# Allegro board core.brd
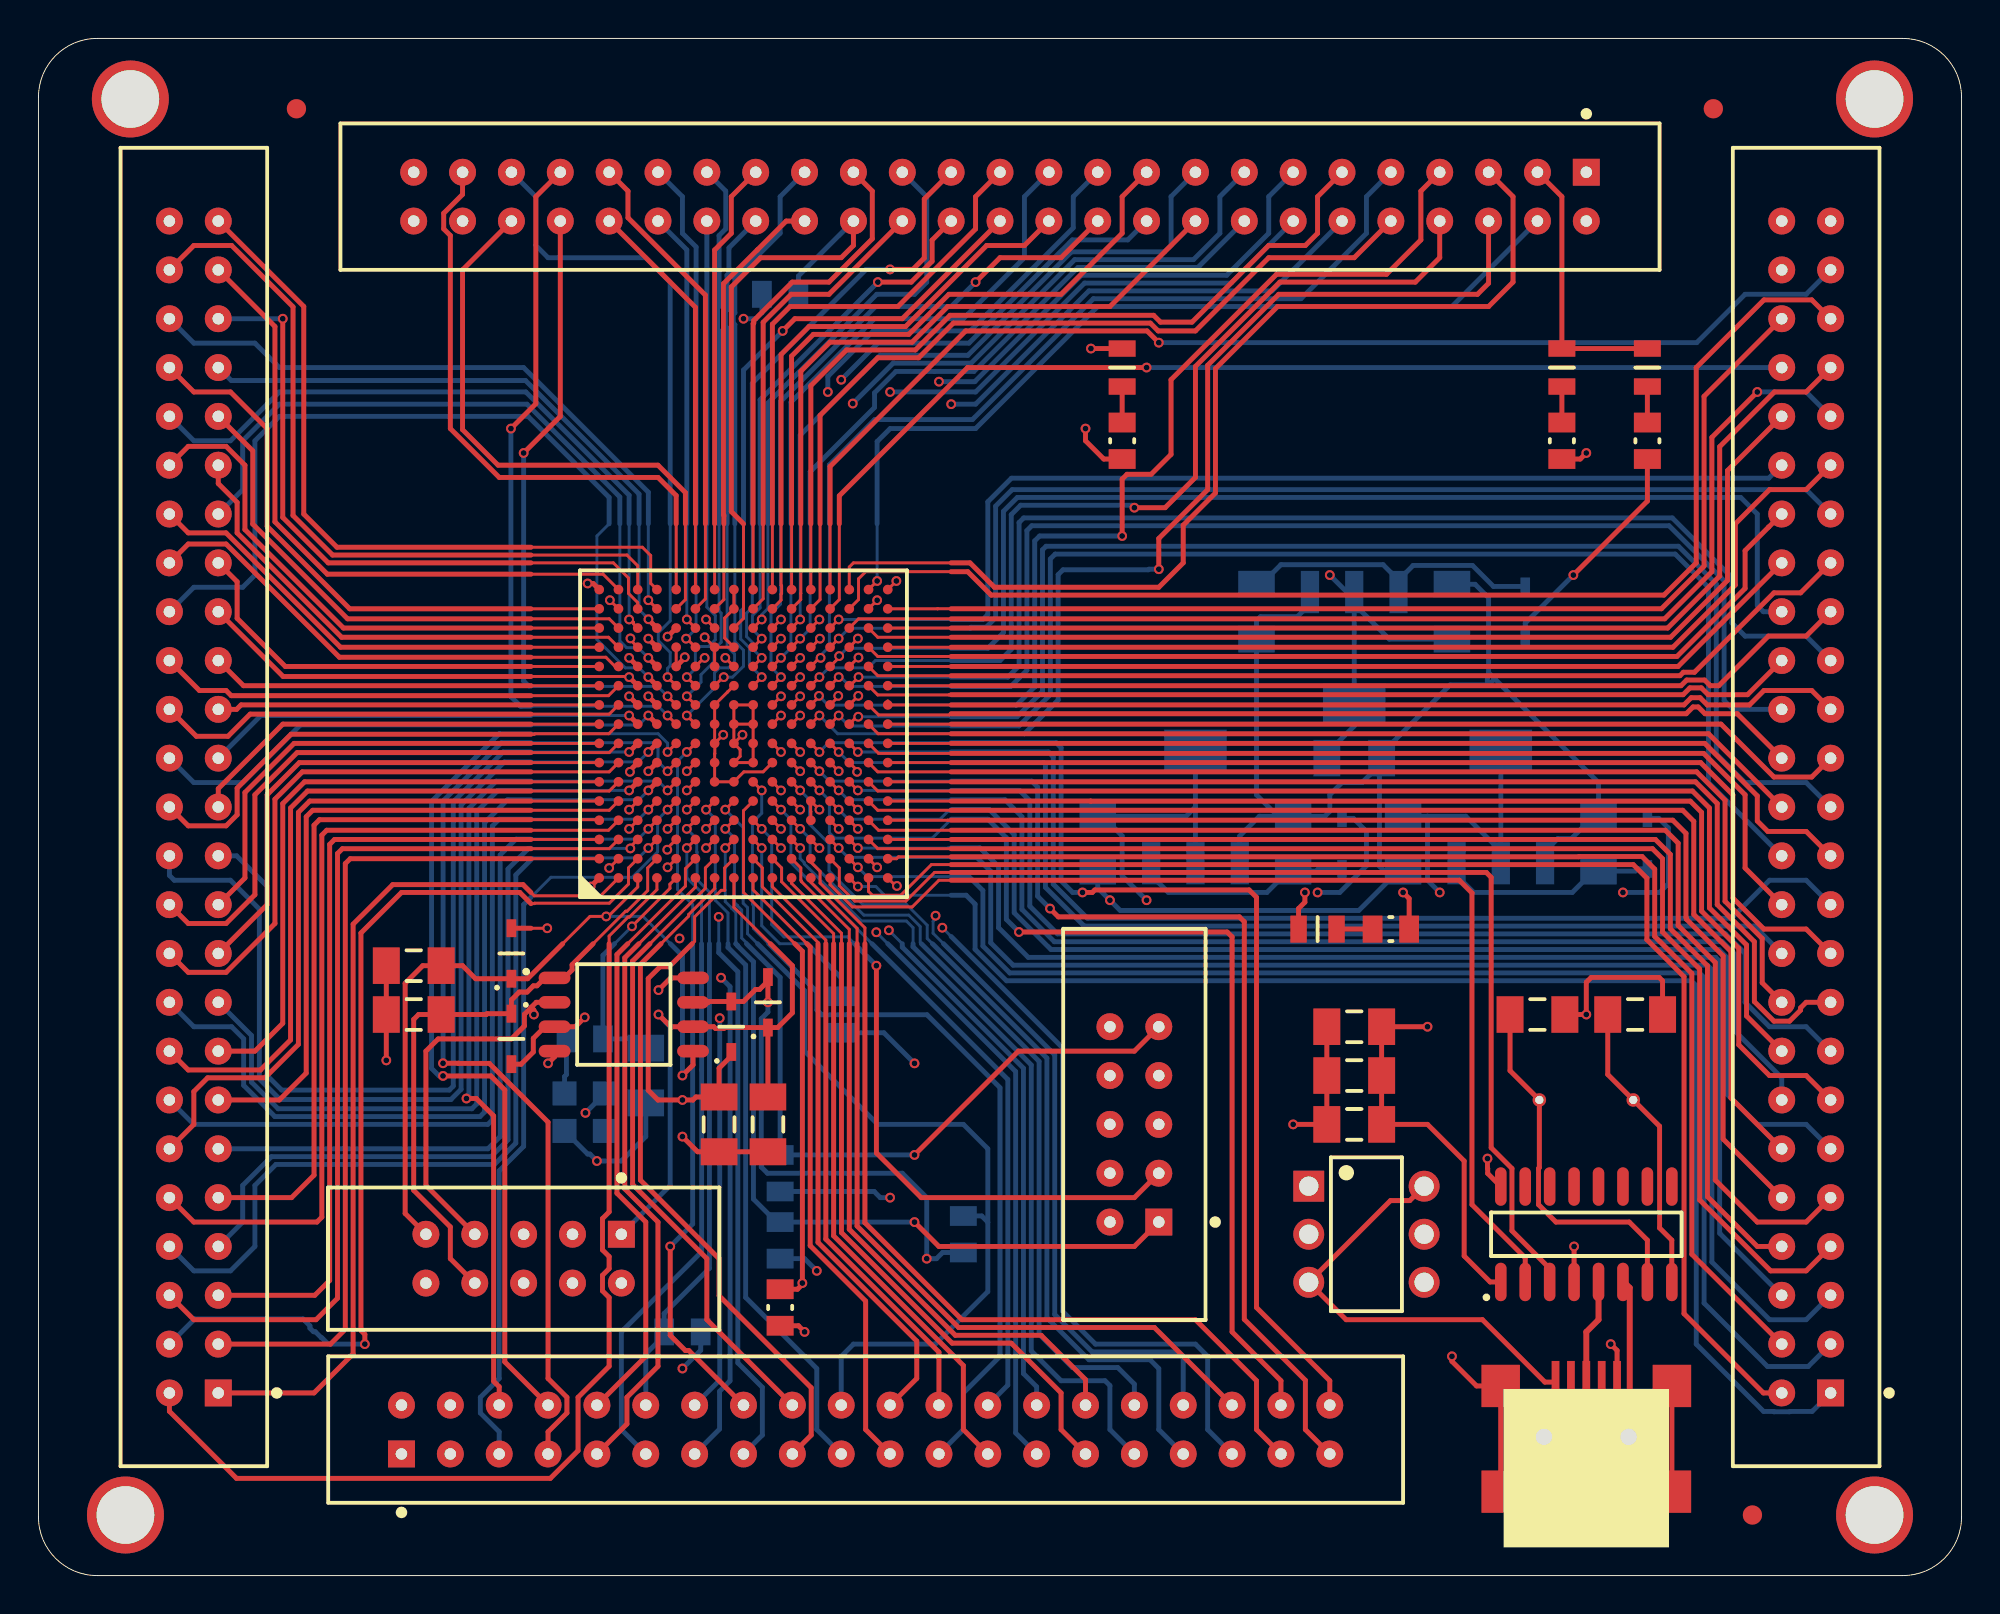
[diagram p0: board, top side]
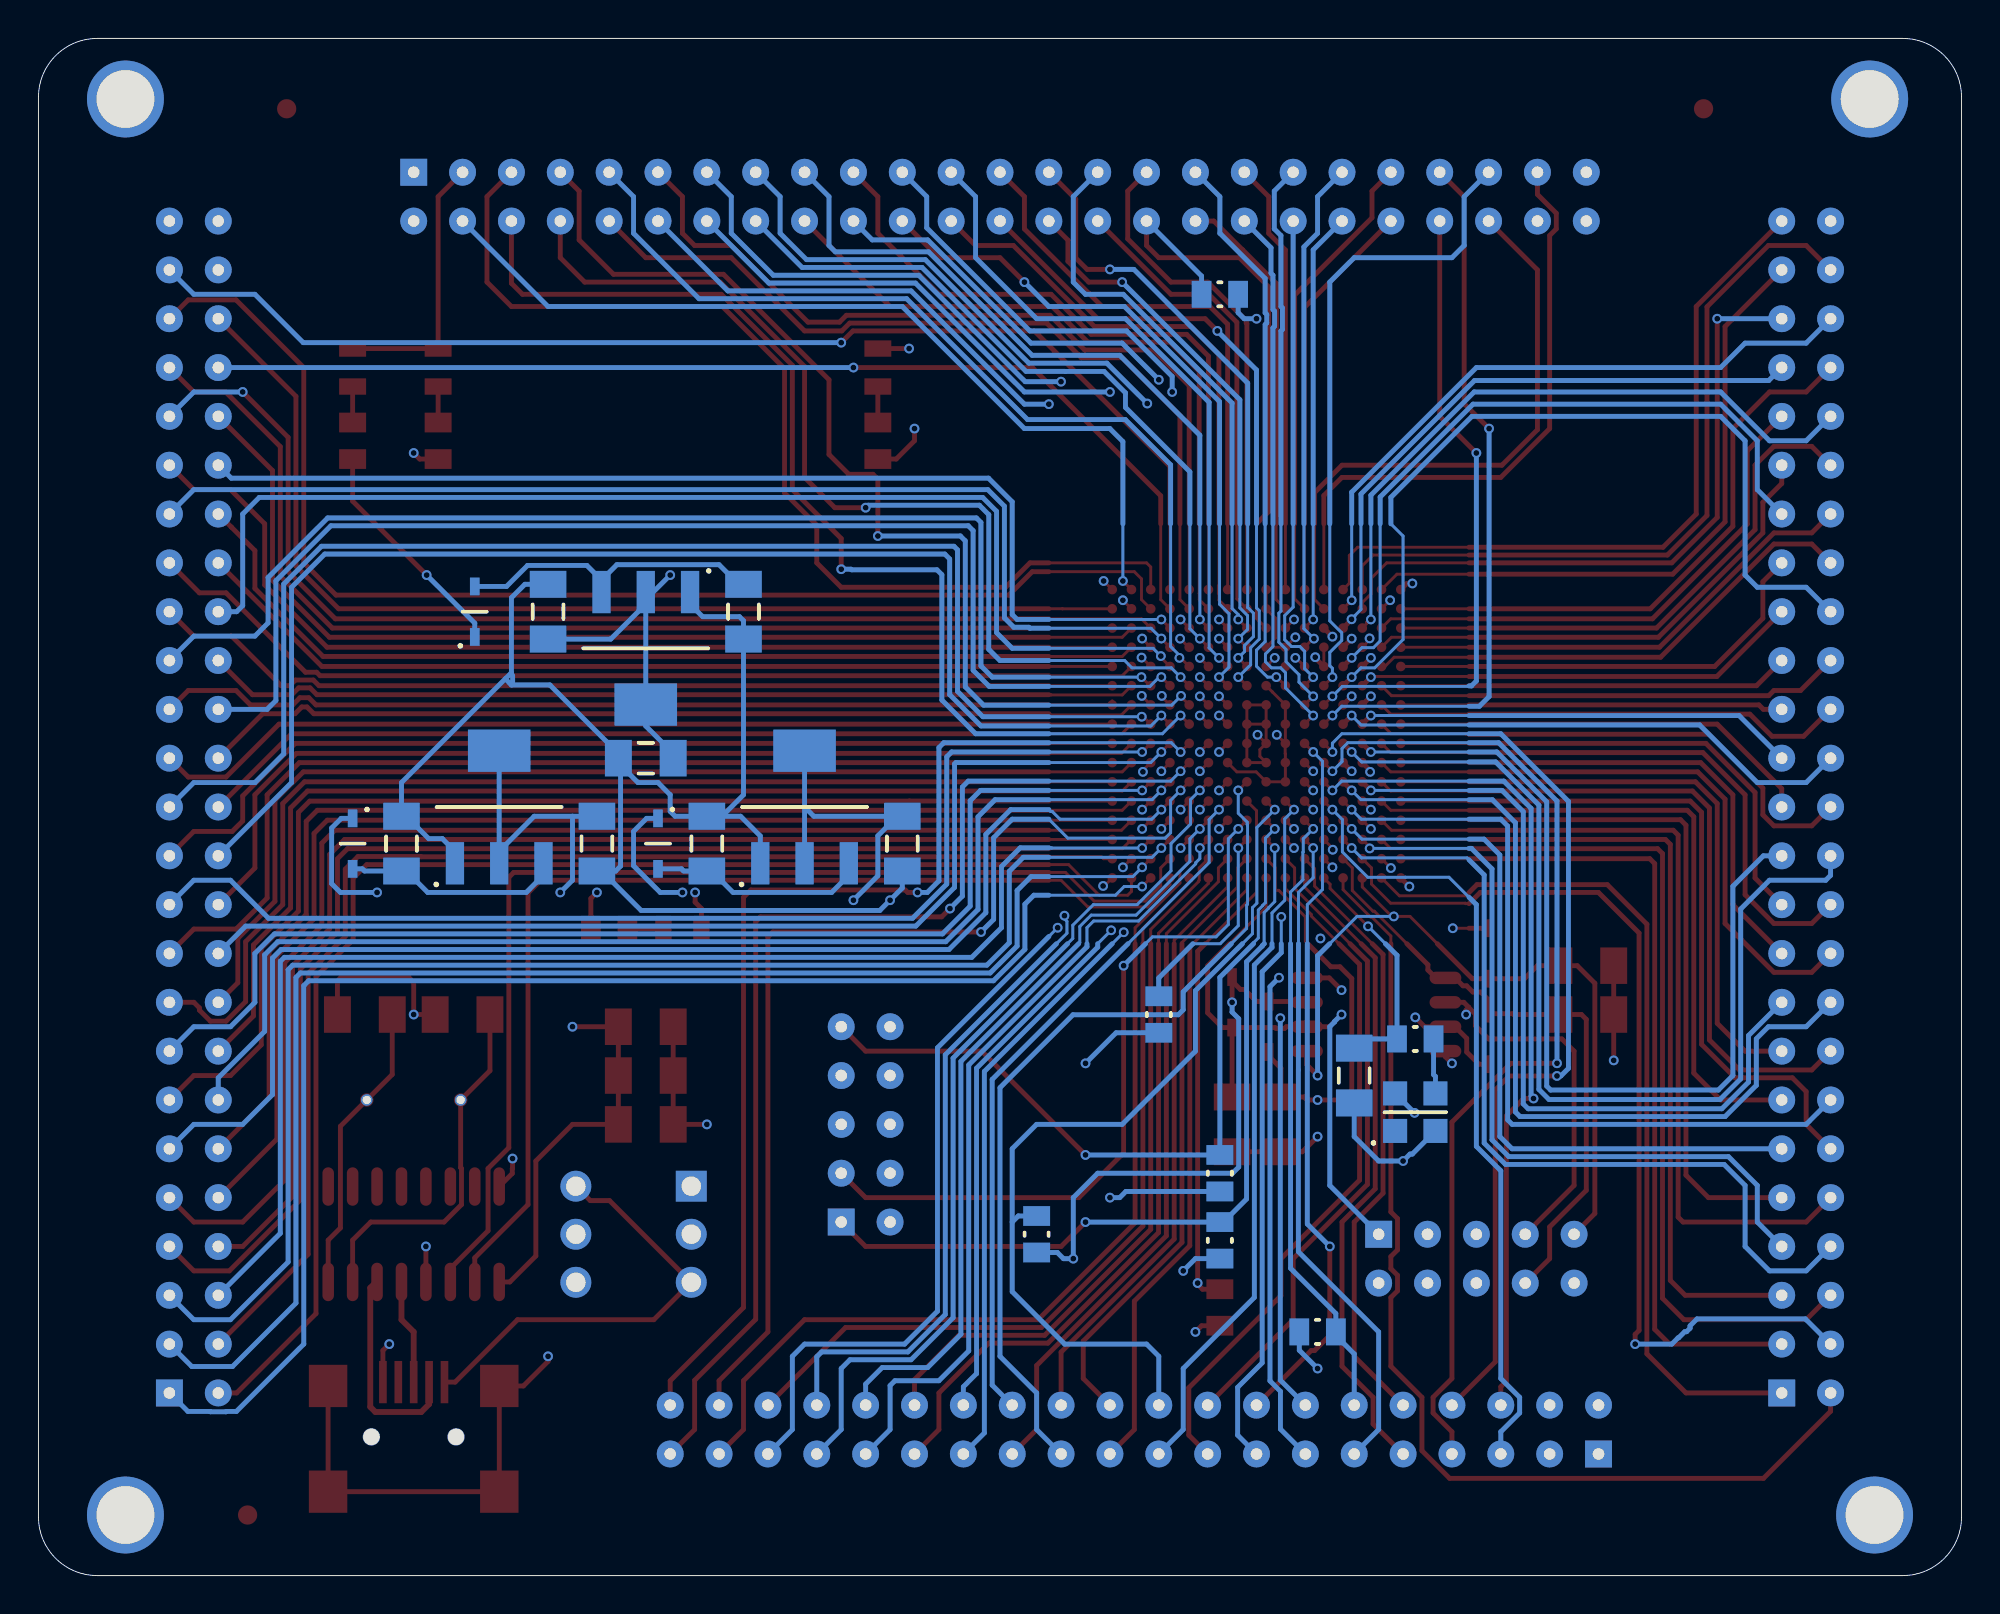
[diagram p1: board, bottom side, seen from below]

Outline 99.97 x 79.96 mm; copper layers: TOP, GND, POWER, BOTTOM. Coordinates in mm from the lower left corner of the outline.
Outline path: 0,76.91 0,3.05 arc(0.89,0.89) 3.05,0 96.93,0 arc(99.08,0.89) 99.97,3.05 99.97,76.91 arc(99.08,79.07) 96.93,79.96 3.05,79.96 arc(0.89,79.07) 0,76.91

## Design rules (mm)
constraint set DEFAULT: min track width 0.254
net group USB: nets D+ D-

## Placement (name value [footprint] x y rotation side)
CB1  10uF  [CAP1206]  73.48 50.14 90 bottom
CB2  10uF  [CAP1206]  63.32 50.14 270 bottom
CB3  10uF  [CAP1206]  68.4 42.52 0 bottom
CB4  10uF  [CAP1206]  81.1 38.07 90 bottom
CB5  10uF  [CAP1206]  70.94 38.07 270 bottom
CB6  10uF  [CAP1206]  65.23 38.07 90 bottom
CB7  10uF  [CAP1206]  55.07 38.07 270 bottom
CB8  10pF  [CAP1206]  31.57 26.01 270 bottom
CT1  10pF  [CAP1206]  19.51 31.72 180 top
CT2  10pF  [CAP1206]  19.51 29.18 180 top
CT3  22pF  [CAP1206]  77.93 29.18 0 top
CT4  22pF  [CAP1206]  83.01 29.18 0 top
CT5  10uF  [CAP1206]  68.4 28.55 0 top
CT6  10uF  [CAP1206]  68.4 26.01 0 top
CT7  10pF  [CAP1206]  35.38 23.47 270 top
CT8  10pF  [CAP1206]  37.92 23.47 270 top
CT9  10uF  [CAP1206]  68.4 23.47 0 top
DB1  BAT60B  [SOD2512X135N]  77.29 50.14 90 bottom
DB2  BAT60B  [SOD2512X135N]  83.64 38.07 270 bottom
DB3  BAT60B  [SOD2512X135N]  67.77 38.07 270 bottom
DT1  F5F1  [DIO0805]  79.2 62.84 270 top
DT2  F5F1  [DIO0805]  66.5 33.63 0 top
DT3  F5F1  [DIO0805]  56.34 62.84 270 top
DT4  F5F1  [DIO0805]  83.64 62.84 270 top
DT5  BAT60B  [SOD2512X135N]  24.59 32.36 90 top
DT6  BAT60B  [SOD2512X135N]  37.92 29.82 90 top
DT7  BAT60B  [SOD2512X135N]  24.59 27.91 270 top
DT8  BAT60B  [SOD2512X135N]  36.02 28.55 90 top
NOREF  -  [unnamed]  4.52 3.15 0 top
NOREF#2  -  [unnamed#2]  87.07 76.3 0 top
NOREF#3  -  [unnamed#2]  89.1 3.15 0 top
NOREF#4  -  [unnamed]  95.45 3.15 0 top
NOREF#5  -  [unnamed#2]  13.41 76.3 0 top
NOREF#6  -  [unnamed]  4.78 76.81 0 top
NOREF#7  -  [unnamed]  95.45 76.81 0 top
RB1  10K  [RES0805]  38.56 66.65 0 bottom
RB2  10K  [RES0805]  41.73 29.18 270 bottom
RB3  10  [RES0805]  28.4 27.91 180 bottom
RB4  10K  [RES0805]  38.56 20.93 270 bottom
RB5  10K  [RES0805]  48.08 17.75 90 bottom
RB6  1K  [RES0805]  38.56 17.44 270 bottom
RB7  10K  [RES0805]  33.48 12.67 180 bottom
RT1  330  [RES0805]  79.2 59.03 90 top
RT2  250  [RES0805]  70.31 33.63 180 top
RT3  120  [RES0805]  56.34 59.03 90 top
RT4  500  [RES0805]  83.64 59.03 90 top
RT5  10K  [RES0805]  38.56 13.94 270 top
SWT1  SW DPDT  [DIP250P600X533-6N]  69.04 17.75 0 top
UB1  AMS1117-3.3  [SOT230P700X180-4N]  68.4 48.23 270 bottom
UB2  AMS1117-2.5  [SOT230P700X180-4N]  76.02 39.98 90 bottom
UB3  AMS1117-1.2  [SOT230P700X180-4N]  60.15 39.98 90 bottom
UB4  TFOM50M4RHKCNT2T  [OSCCC190X210X120-4N]  28.4 24.1 90 bottom
UT1  PIN50  [SHDR0S254P25X2_6858X762X500]  80.47 73 180 top
UT2  EP4CE10F17C8N  [BGA256C100P16X16_1700X1700X200]  36.65 43.79 90 top
UT3  PIN50  [SHDR0S254P25X2_6858X762X500]  9.35 9.5 90 top
UT4  PIN50  [SHDR0S254P25X2_6858X762X500]  93.17 9.5 90 top
UT5  ZD25WQ16BUIGR  [SPIFLASH]  30.43 29.18 0 top
UT6  JTAG  [SHDR0S254P5X2_2035X740X500]  58.24 18.39 90 top
UT7  CH340G  [SOP127P600X990-16N]  80.47 17.75 90 top
UT8  JTAG  [SHDR0S254P5X2_2035X740X500]  30.3 17.75 180 top
UT9  PIN40  [SHDR0S254P20X2_5588X762X500]  18.87 6.32 0 top
UT10  MiniUSB  [MINIUSB]  80.47 7.21 0 top
YT1  CRYSTAL  [OSCCC]  80.47 24.74 0 top

## Library data of the parts
CB1 CB5 CB7 = CAP POL
CB2 CB4 CB6 = CAP
CB3 CB8 CT1-CT9 = C
DB1 DB2 DT5-DT8 = DIODE
DB3 = DIODE_4
DT1-DT4 = F5F1
RB1-RB7 RT1-RT5 = R
SWT1 = SW DPDT
UB1 = AMS1117-3.3
UB2 = AMS1117-2.5
UB3 = AMS1117-1.2
UB4 = CRYSTAL_SOURCE
UT1 UT3 UT4 = PIN50
UT2 = EP4CE10F17C8N
UT5 = Spi_Flash
UT6 UT8 = JTAG
UT7 = CH340G
UT9 = PIN40
UT10 = MiniUSB
YT1 = CRYSTAL

## Footprints (pads in the part's own frame, mm; a bottom-side part is the same pattern mirrored in y, then rotated)
BGA256C100P16X16_1700X1700X200
  round 0.5 smd: A1(-7.501,7.501) A2(-6.5,7.501) A3(-5.499,7.501) A4(-4.501,7.501) A5(-3.5,7.501) A6(-2.499,7.501) A7(-1.501,7.501) A8(-0.5,7.501) A9(0.5,7.501) A10(1.501,7.501) A11(2.499,7.501) A12(3.5,7.501) A13(4.501,7.501) A14(5.499,7.501) A15(6.5,7.501) A16(7.501,7.501) B1(-7.501,6.5) B2(-6.5,6.5) B3(-5.499,6.5) B4(-4.501,6.5) B5(-3.5,6.5) B6(-2.499,6.5) B7(-1.501,6.5) B8(-0.5,6.5) B9(0.5,6.5) B10(1.501,6.5) B11(2.499,6.5) B12(3.5,6.5) B13(4.501,6.5) B14(5.499,6.5) B15(6.5,6.5) B16(7.501,6.5) C1(-7.501,5.499) C2(-6.5,5.499) C3(-5.499,5.499) C4(-4.501,5.499) C5(-3.5,5.499) C6(-2.499,5.499) C7(-1.501,5.499) C8(-0.5,5.499) C9(0.5,5.499) C10(1.501,5.499) C11(2.499,5.499) C12(3.5,5.499) C13(4.501,5.499) C14(5.499,5.499) C15(6.5,5.499) C16(7.501,5.499) D1(-7.501,4.501) D2(-6.5,4.501) D3(-5.499,4.501) D4(-4.501,4.501) D5(-3.5,4.501) D6(-2.499,4.501) D7(-1.501,4.501) D8(-0.5,4.501) D9(0.5,4.501) D10(1.501,4.501) D11(2.499,4.501) D12(3.5,4.501) D13(4.501,4.501) D14(5.499,4.501) D15(6.5,4.501) D16(7.501,4.501) E1(-7.501,3.5) E2(-6.5,3.5) E3(-5.499,3.5) E4(-4.501,3.5) E5(-3.5,3.5) E6(-2.499,3.5) E7(-1.501,3.5) E8(-0.5,3.5) E9(0.5,3.5) E10(1.501,3.5) E11(2.499,3.5) E12(3.5,3.5) E13(4.501,3.5) E14(5.499,3.5) E15(6.5,3.5) E16(7.501,3.5) F1(-7.501,2.499) F2(-6.5,2.499) F3(-5.499,2.499) F4(-4.501,2.499) F5(-3.5,2.499) F6(-2.499,2.499) F7(-1.501,2.499) F8(-0.5,2.499) F9(0.5,2.499) F10(1.501,2.499) F11(2.499,2.499) F12(3.5,2.499) F13(4.501,2.499) F14(5.499,2.499) F15(6.5,2.499) F16(7.501,2.499) G1(-7.501,1.501) G2(-6.5,1.501) G3(-5.499,1.501) G4(-4.501,1.501) G5(-3.5,1.501) G6(-2.499,1.501) G7(-1.501,1.501) G8(-0.5,1.501) G9(0.5,1.501) G10(1.501,1.501) G11(2.499,1.501) G12(3.5,1.501) G13(4.501,1.501) G14(5.499,1.501) G15(6.5,1.501) G16(7.501,1.501) H1(-7.501,0.5) H2(-6.5,0.5) H3(-5.499,0.5) H4(-4.501,0.5) H5(-3.5,0.5) H6(-2.499,0.5) H7(-1.501,0.5) H8(-0.5,0.5) H9(0.5,0.5) H10(1.501,0.5) H11(2.499,0.5) H12(3.5,0.5) H13(4.501,0.5) H14(5.499,0.5) H15(6.5,0.5) H16(7.501,0.5) J1(-7.501,-0.5) J2(-6.5,-0.5) J3(-5.499,-0.5) J4(-4.501,-0.5) J5(-3.5,-0.5) J6(-2.499,-0.5) J7(-1.501,-0.5) J8(-0.5,-0.5) J9(0.5,-0.5) J10(1.501,-0.5) J11(2.499,-0.5) J12(3.5,-0.5) J13(4.501,-0.5) J14(5.499,-0.5) J15(6.5,-0.5) J16(7.501,-0.5) K1(-7.501,-1.501) K2(-6.5,-1.501) K3(-5.499,-1.501) K4(-4.501,-1.501) K5(-3.5,-1.501) K6(-2.499,-1.501) K7(-1.501,-1.501) K8(-0.5,-1.501) K9(0.5,-1.501) K10(1.501,-1.501) K11(2.499,-1.501) K12(3.5,-1.501) K13(4.501,-1.501) K14(5.499,-1.501) K15(6.5,-1.501) K16(7.501,-1.501) L1(-7.501,-2.499) L2(-6.5,-2.499) L3(-5.499,-2.499) L4(-4.501,-2.499) L5(-3.5,-2.499) L6(-2.499,-2.499) L7(-1.501,-2.499) L8(-0.5,-2.499) L9(0.5,-2.499) L10(1.501,-2.499) L11(2.499,-2.499) L12(3.5,-2.499) L13(4.501,-2.499) L14(5.499,-2.499) L15(6.5,-2.499) L16(7.501,-2.499) M1(-7.501,-3.5) M2(-6.5,-3.5) M3(-5.499,-3.5) M4(-4.501,-3.5) M5(-3.5,-3.5) M6(-2.499,-3.5) M7(-1.501,-3.5) M8(-0.5,-3.5) M9(0.5,-3.5) M10(1.501,-3.5) M11(2.499,-3.5) M12(3.5,-3.5) M13(4.501,-3.5) M14(5.499,-3.5) M15(6.5,-3.5) M16(7.501,-3.5) N1(-7.501,-4.501) N2(-6.5,-4.501) N3(-5.499,-4.501) N4(-4.501,-4.501) N5(-3.5,-4.501) N6(-2.499,-4.501) N7(-1.501,-4.501) N8(-0.5,-4.501) N9(0.5,-4.501) N10(1.501,-4.501) N11(2.499,-4.501) N12(3.5,-4.501) N13(4.501,-4.501) N14(5.499,-4.501) N15(6.5,-4.501) N16(7.501,-4.501) P1(-7.501,-5.499) P2(-6.5,-5.499) P3(-5.499,-5.499) P4(-4.501,-5.499) P5(-3.5,-5.499) P6(-2.499,-5.499) P7(-1.501,-5.499) P8(-0.5,-5.499) P9(0.5,-5.499) P10(1.501,-5.499) P11(2.499,-5.499) P12(3.5,-5.499) P13(4.501,-5.499) P14(5.499,-5.499) P15(6.5,-5.499) P16(7.501,-5.499) R1(-7.501,-6.5) R2(-6.5,-6.5) R3(-5.499,-6.5) R4(-4.501,-6.5) R5(-3.5,-6.5) R6(-2.499,-6.5) R7(-1.501,-6.5) R8(-0.5,-6.5) R9(0.5,-6.5) R10(1.501,-6.5) R11(2.499,-6.5) R12(3.5,-6.5) R13(4.501,-6.5) R14(5.499,-6.5) R15(6.5,-6.5) R16(7.501,-6.5) T1(-7.501,-7.501) T2(-6.5,-7.501) T3(-5.499,-7.501) T4(-4.501,-7.501) T5(-3.5,-7.501) T6(-2.499,-7.501) T7(-1.501,-7.501) T8(-0.5,-7.501) T9(0.5,-7.501) T10(1.501,-7.501) T11(2.499,-7.501) T12(3.5,-7.501) T13(4.501,-7.501) T14(5.499,-7.501) T15(6.5,-7.501) T16(7.501,-7.501)
CAP1206
  rect 1.4x1.9 smd: 1(-1.425,0) 2(1.425,0)
DIO0805
  rect 0.851x1.4 smd: 1(-0.988,0) 2(0.988,0)
DIP250P600X533-6N
  rect 1.605x1.605 hole 1.006: 1(-3,2.499)
  round 1.605 hole 1.006: 2(-3,-2.499) 3(-3,0) 4(3,-2.499) 5(3,2.499) 6(3,0)
MINIUSB
  round 0.899 hole 0.851 unplated: (-2.2,0) (2.2,0)
  rect 0.399x2.2 smd: 1(-1.6,2.85) 2(-0.8,2.85) 3(0,2.85) 4(0.8,2.85) 5(1.6,2.85)
  rect 1.999x2.2 smd: 6(-4.45,2.649) 7(4.45,2.649) 8(4.45,-2.85) 9(-4.45,-2.85)
OSCCC
  round 0.701 hole 0.429: 1(-2.441,0) 2(2.441,0)
OSCCC190X210X120-4N
  rect 1.25x1.25 smd: 1(-0.975,1.049) 2(-0.975,-1.049) 3(0.975,-1.049) 4(0.975,1.049)
RES0805
  rect 1.026x1.4 smd: 1(-0.95,0) 2(0.95,0)
SHDR0S254P5X2_2035X740X500
  rect 1.4x1.4 hole 0.599: 1(0,0)
  round 1.4 hole 0.599: 2(0,2.54) 3(2.54,0) 4(2.54,2.54) 5(5.08,0) 6(5.08,2.54) 7(7.62,0) 8(7.62,2.54) 9(10.16,0) 10(10.16,2.54)
SHDR0S254P20X2_5588X762X500
  rect 1.4x1.4 hole 0.599: 1(0,0)
  round 1.4 hole 0.599: 2(0,2.54) 3(2.54,0) 4(2.54,2.54) 5(5.08,0) 6(5.08,2.54) 7(7.62,0) 8(7.62,2.54) 9(10.16,0) 10(10.16,2.54) 11(12.7,0) 12(12.7,2.54) 13(15.24,0) 14(15.24,2.54) 15(17.78,0) 16(17.78,2.54) 17(20.32,0) 18(20.32,2.54) 19(22.86,0) 20(22.86,2.54) 21(25.4,0) 22(25.4,2.54) 23(27.94,0) 24(27.94,2.54) 25(30.48,0) 26(30.48,2.54) 27(33.02,0) 28(33.02,2.54) 29(35.56,0) 30(35.56,2.54) 31(38.1,0) 32(38.1,2.54) 33(40.64,0) 34(40.64,2.54) 35(43.18,0) 36(43.18,2.54) 37(45.72,0) 38(45.72,2.54) 39(48.26,0) 40(48.26,2.54)
SHDR0S254P25X2_6858X762X500
  rect 1.4x1.4 hole 0.599: 1(0,0)
  round 1.4 hole 0.599: 2(0,2.54) 3(2.54,0) 4(2.54,2.54) 5(5.08,0) 6(5.08,2.54) 7(7.62,0) 8(7.62,2.54) 9(10.16,0) 10(10.16,2.54) 11(12.7,0) 12(12.7,2.54) 13(15.24,0) 14(15.24,2.54) 15(17.78,0) 16(17.78,2.54) 17(20.32,0) 18(20.32,2.54) 19(22.86,0) 20(22.86,2.54) 21(25.4,0) 22(25.4,2.54) 23(27.94,0) 24(27.94,2.54) 25(30.48,0) 26(30.48,2.54) 27(33.02,0) 28(33.02,2.54) 29(35.56,0) 30(35.56,2.54) 31(38.1,0) 32(38.1,2.54) 33(40.64,0) 34(40.64,2.54) 35(43.18,0) 36(43.18,2.54) 37(45.72,0) 38(45.72,2.54) 39(48.26,0) 40(48.26,2.54) 41(50.8,0) 42(50.8,2.54) 43(53.34,0) 44(53.34,2.54) 45(55.88,0) 46(55.88,2.54) 47(58.42,0) 48(58.42,2.54) 49(60.96,0) 50(60.96,2.54)
SOD2512X135N
  rect 0.925x0.5 smd: 1(1.313,0) 2(-1.313,0)
SOP127P600X990-16N
  oval 1.999x0.599 smd: 1(-2.482,4.445) 2(-2.482,3.175) 3(-2.482,1.905) 4(-2.482,0.635) 5(-2.482,-0.635) 6(-2.482,-1.905) 7(-2.482,-3.175) 8(-2.482,-4.445) 9(2.482,-4.445) 10(2.482,-3.175) 11(2.482,-1.905) 12(2.482,-0.635) 13(2.482,0.635) 14(2.482,1.905) 15(2.482,3.175) 16(2.482,4.445)
SOT230P700X180-4N
  rect 2.2x0.95 smd: 1(-2.926,2.301) 2(-2.926,0) 3(-2.926,-2.301)
  rect 2.2x3.251 smd: 4(2.926,0)
SPIFLASH
  oval 1.651x0.65 smd: 1(-3.599,1.905) 2(-3.599,0.635) 3(-3.599,-0.635) 4(-3.599,-1.905) 5(3.599,-1.905) 6(3.599,-0.635) 7(3.599,0.635) 8(3.599,1.905)
unnamed
  round 4 hole 3 unplated: (0,0)
unnamed#2
  round 1.001 smd: (0,0)

## Nets
GND: CB1.2 CB2.2 CB3.2 CB4.2 CB5.2 CB6.2 CB7.2 CB8.2 CT1.2 CT2.2 CT3.2 CT4.2 CT5.2 CT6.2 CT7.2 CT8.2 CT9.2 DT1.1(CATHODE) DT2.1(CATHODE) DT3.1(CATHODE) DT4.1(CATHODE) RB2.2 RB6.2 UB1.1 UB2.1 UB3.1 UB4.2 UT1.3 UT1.50 UT2.B2 UT2.B15 UT2.C5 UT2.C12 UT2.D7 UT2.D10 UT2.E2 UT2.E4 UT2.E12 UT2.E13 UT2.G4 UT2.G12 UT2.G13 UT2.H7 UT2.H8 UT2.H9 UT2.H10 UT2.H13 UT2.H15 UT2.H16 UT2.J7 UT2.J8 UT2.J9 UT2.J10 UT2.K4 UT2.K13 UT2.M4 UT2.M5 UT2.M13 UT2.N7 UT2.N10 UT2.P5 UT2.P12 UT2.R2 UT2.R15 UT3.50 UT4.48 UT5.4 UT6.2 UT6.10 UT7.1 UT8.2 UT8.10 UT10.5 UT10.6 UT10.7 UT10.8 UT10.9
VBUS: SWT1.2 SWT1.5 UT10.1(VCC)
VCC: CT5.1 CT6.1 CT9.1 DB1.2 DB2.2 DB3.2 RT4.1 SWT1.3 SWT1.6(NO2) UB4.4(VCC) UT1.2 UT1.49 UT4.49 UT7.16 UT9.1
VCCA: CB5.1 RB4.2 RT2.1 RT5.2 UB2.2(VOUT) UB2.4 UT2.F12 UT2.H12 UT2.L5 UT6.4 UT8.4 UT9.3
VCCINT: CB7.1 RT3.1 UB3.2(VOUT) UB3.4 UT2.D13 UT2.G6 UT2.G7 UT2.G8 UT2.G9 UT2.G10 UT2.H6 UT2.H11 UT2.K7 UT2.N4 UT9.2
VCCIO: CB1.1 CB3.1 DT5.1(K) DT6.1(K) DT7.1(K) DT8.1(K) RB1.1 RB5.1 RB7.1 RT1.1 UB1.2(VOUT) UB1.4 UT1.1 UT1.48 UT2.A1 UT2.A16 UT2.C4 UT2.C7(VCCIO8  C7) UT2.C10 UT2.C13 UT2.E3 UT2.E14 UT2.G3 UT2.G14 UT2.K3 UT2.K14 UT2.M3 UT2.M14 UT2.P4 UT2.P7 UT2.P10 UT2.P13 UT2.T1 UT2.T16 UT4.50 UT5.3(WP#) UT5.7 UT5.8 UT7.4 UT9.4
A2: UT2.A2 UT3.3
A3: UT2.A3 UT3.5
A4: UT2.A4 UT3.9
A5: UT2.A5 UT3.12
A6: UT2.A6 UT3.15
A7: UT2.A7 UT3.19
A8: UT2.A8 UT3.21
A9: UT2.A9 UT3.25
A10: UT2.A10 UT3.29
A11: UT2.A11 UT3.31
A12: UT2.A12 UT3.35
A13: UT2.A13 UT3.38
A14: UT2.A14 UT3.40
A15: UT2.A15 UT3.44
ASDI_PAGE: CT1.1 DT5.2 UT2.C1 UT5.5 UT8.9
B1: UT2.B1 UT3.1
B3: UT2.B3 UT3.6
B4: UT2.B4 UT3.10
B5: UT2.B5 UT3.13
B6: UT2.B6 UT3.16
B7: UT2.B7 UT3.20
B8: UT2.B8 UT3.22
B9: UT2.B9 UT3.26
B10: UT2.B10 UT3.30
B11: UT2.B11 UT3.32
B12: UT2.B12 UT3.36
B13: UT2.B13 UT3.39
B14: UT2.B14 UT3.41
B16: UT2.B16 UT3.47
C2: UT2.C2 UT3.4
C3: UT2.C3 UT3.7
C6: UT2.C6 UT3.17
C8: UT2.C8 UT3.23
C9: UT2.C9 UT3.27
C11: UT2.C11 UT3.33
C14: UT2.C14 UT3.42
C15: UT2.C15 UT3.45
C16: UT2.C16 UT3.48
CLK: CB8.1 RB3.1 UT2.E1
CONF_DONE_PAGE: RB1.2 UT1.32 UT2.H14 UT8.3
D1: UT2.D1 UT3.2
D3: UT2.D3 UT3.8
D4: UT2.D4 UT3.11
D5: UT2.D5 UT3.14
D6: UT2.D6 UT3.18
D8: UT2.D8 UT3.24
D9: UT2.D9 UT3.28
D11: UT2.D11 UT3.34
D12: UT2.D12 UT3.37
D14: UT2.D14 UT3.43
D15: UT2.D15 UT3.46
D16: UT2.D16 UT3.49
D+: UT7.5 UT10.3
D-: UT7.6 UT10.2
DATA_PAGE: CT7.1 DT8.2 UT2.H2 UT5.2 UT8.7
DCLK_PAGE: CT8.1 DT6.2 UT2.H1 UT5.6 UT8.1
E5: UT2.E5 UT9.5
E6: UT2.E6 UT9.6
E7: UT2.E7 UT9.7
E8: UT2.E8 UT9.8
E9: UT1.43 UT2.E9
E10: UT1.44 UT2.E10
E11: UT1.45 UT2.E11
E15: UT1.46 UT2.E15
E16: UT1.47 UT2.E16
F1: UT2.F1 UT9.9
F2: UT2.F2 UT9.10
F3: UT2.F3 UT9.11
F5: UT2.F5 UT9.13
F6: UT2.F6 UT9.14
F7: UT2.F7 UT9.15
F8: UT2.F8 UT9.16
F9: UT1.36 UT2.F9
F10: UT1.37 UT2.F10
F11: UT1.38 UT2.F11
F13: UT1.39 UT2.F13
F14: UT1.40 UT2.F14
F15: UT1.41 UT2.F15
F16: UT1.42 UT2.F16
G1: UT2.G1 UT9.17
G2: UT2.G2 UT9.18
G5: UT2.G5 UT9.19
G11: UT1.33 UT2.G11
G15: UT1.34 UT2.G15
G16: UT1.35 UT2.G16
J1: UT2.J1 UT9.21
J2: UT2.J2 UT9.22
J6: UT2.J6 UT9.23
J11: UT1.26 UT2.J11
J12: UT1.27 UT2.J12
J13: UT1.28 UT2.J13
J14: UT1.29 UT2.J14
J15: UT1.30 UT2.J15
J16: UT1.31 UT2.J16
K1: UT2.K1 UT9.24
K2: UT2.K2 UT9.25
K5: UT2.K5 UT9.26
K6: UT2.K6 UT9.27
K8: UT2.K8 UT9.28
K9: UT1.20 UT2.K9
K10: UT1.21 UT2.K10
K11: UT1.22 UT2.K11
K12: UT1.23 UT2.K12
K15: UT1.24 UT2.K15
K16: UT1.25 UT2.K16
L1: UT2.L1 UT9.29
L2: UT2.L2 UT9.30
L3: UT2.L3 UT9.31
L4: UT2.L4 UT9.32
L6: UT2.L6 UT9.33
L7: UT2.L7 UT9.34
L8: UT2.L8 UT9.35
L9: UT1.12 UT2.L9
L10: UT1.13 UT2.L10
L11: UT1.14 UT2.L11
L12: UT1.15 UT2.L12
L13: UT1.16 UT2.L13
L14: UT1.17 UT2.L14
L15: UT1.18 UT2.L15
L16: UT1.19 UT2.L16
M1: UT2.M1 UT9.36
M2: UT2.M2 UT9.37
M6: UT2.M6 UT9.38
M7: UT2.M7 UT9.39
M8: UT2.M8 UT9.40
M9: UT1.6 UT2.M9
M10: UT1.7 UT2.M10
M11: UT1.8 UT2.M11
M12: UT1.9 UT2.M12
M15: UT1.10 UT2.M15
M16: UT1.11 UT2.M16
N3: UT2.N3 UT4.5
N5: UT2.N5 UT4.11
N6: UT2.N6 UT4.14
N8: UT2.N8 UT4.20
N9: UT2.N9 UT4.24
N11: UT2.N11 UT4.30
N12: UT2.N12 UT4.34
N13: UT2.N13 UT4.37
N14: UT2.N14 UT4.40
N15: UT2.N15 UT4.44
N16: UT2.N16 UT4.47
NCE_PAGE: RB2.1 UT2.J3 UT8.6
NCONFIG_PAGE: RB5.2 UT2.H5 UT8.5(TMS) UT9.20
NCS0_PAGE: CT2.1 DT7.2 UT2.D2 UT5.1 UT8.8
NSTATUS_PAGE: RB7.2 UT2.F4 UT9.12
P1: UT2.P1 UT4.1
P2: UT2.P2 UT4.3
P3: UT2.P3 UT4.6
P6: UT2.P6 UT4.15
P8: UT2.P8 UT4.21
P9: UT2.P9 UT4.25
P11: UT2.P11 UT4.31
P14: UT2.P14 UT4.41
P15: UT2.P15 UT4.45
P16: UT1.5 UT2.P16
R1: UT2.R1 UT4.2
R3: UT2.R3 UT4.7
R4: UT2.R4 UT4.9
R5: UT2.R5 UT4.12
R6: UT2.R6 UT4.16
R7: UT2.R7 UT4.18
R8: UT2.R8 UT4.22
R9: UT2.R9 UT4.26
R10: UT2.R10 UT4.28
R11: UT2.R11 UT4.32
R12: UT2.R12 UT4.35
R13: UT2.R13 UT4.38
R14: UT2.R14 UT4.42
R16: UT1.4 UT2.R16
RXD_PAGE: UT2.N2 UT7.3
T2: UT2.T2 UT4.4
T3: UT2.T3 UT4.8
T4: UT2.T4 UT4.10
T5: UT2.T5 UT4.13
T6: UT2.T6 UT4.17
T7: UT2.T7 UT4.19
T8: UT2.T8 UT4.23
T9: UT2.T9 UT4.27
T10: UT2.T10 UT4.29
T11: UT2.T11 UT4.33
T12: UT2.T12 UT4.36
T13: UT2.T13 UT4.39
T14: UT2.T14 UT4.43
T15: UT2.T15 UT4.46
TCK_PAGE: RB6.1 UT2.H3 UT6.1
TDI_PAGE: RB4.1 UT2.H4 UT6.9
TDO_PAGE: UT2.J4 UT6.3
TMS_PAGE: RT5.1 UT2.J5 UT6.5(TMS)
TXD_PAGE: UT2.N1 UT7.2
N06193: CB6.1 DB3.1(K) UB3.3
N06888: CB4.1 DB2.1(K) UB2.3
N07197: CB2.1 DB1.1(K) UB1.3
N08035: RB3.2 UB4.3
N10507: CT3.1 UT7.7(XI) YT1.1
N10518: CT4.1 UT7.8 YT1.2
N65025: DT4.2 RT4.2
N65392: DT3.2 RT3.2
N65615: DT2.2 RT2.2
N65787: DT1.2 RT1.2

Pads without a net: SWT1 1 4; UB4 1; UT6 6 7 8; UT7 9 10 11 12 13 14 15; UT10 4

## Via types
v1: diameter 0.508, hole 0.305, TOP to BOTTOM, 216 vias

## Routing (per net, layer and track width the routed paths; a pad name or vN(x,y) marks a point on that pad's centre or on a via; arc(x,y) is an arc through that point)
GND: length 253.3
  TOP w0.152: UT2.P12 42.61,47.75 v1(42.63,47.75) ; UT2.R2 v1(43.6,36.84) ; UT2.J9 UT2.J8 UT2.J7 UT2.H7 36.48,42.61 36.48,42.96 UT2.H8 ; UT2.J9 UT2.J10 UT2.H10 UT2.H9 ; UT2.J9 UT2.H9 ; UT2.G13 UT2.H13 35.67,48.77 35.67,49.81 UT2.H15 UT2.H16 ; UT2.G13 v1(34.63,48.81) ; UT2.G13 UT2.G12 ; 41.52,45.77 41.53,45.76 v1(41.58,45.76) 41.52,45.7 41.52,45.66 UT2.N10 ; UT2.M13 40.18,48.29 v1(40.62,48.74) ; UT2.M4 40.15,39.75 40.14,39.76 40.14,40.28 UT2.M5 v1(40.6,39.84) ; UT2.E4 v1(32.71,38.84) ; UT2.B15 v1(29.71,50.74) ; UT2.H9 UT2.H8 ; UT2.H8 v1(36.6,43.74) ; UT2.B2 v1(29.67,36.8) ; UT2.P5 v1(42.6,39.84) ; UT2.C5 v1(30.71,39.84) ; UT2.K13 v1(38.6,48.74) ; UT2.G4 v1(34.7,38.84) ; UT2.N7 v1(41.6,41.84) ; UT2.K4 v1(38.6,38.84) ; UT2.R15 v1(43.6,50.74) ; UT2.E2 v1(32.71,36.84) ; UT2.E13 UT2.E12
  TOP w0.254: UT10.5 82.07,11.71 v1(81.74,12.04) ; UT7.1 75.47,15.27 74.12,16.62 74.12,21.56 72.21,23.47 CT9.2 CT6.2 CT5.2 v1(72.21,28.55) ; UT1.3 79.2,71.73 DT1.1 DT4.1 ; UT2.C12 v1(30.71,47.74) ; v1(26.49,26.64) 26.83,26.98 UT5.4 ; v1(18.08,26.8) CT2.2 CT1.2 ; UT10.7 UT10.8 UT10.9 UT10.6 74.76,9.86 73.48,11.14 v1(73.48,11.4) ; v1(65.84,35.53) 65.84,35.03 65.51,34.7 DT2.1 ; UT2.D7 v1(31.7,41.84) ; CT8.2 CT7.2 34.27,22.04 v1(33.48,22.83) ; CT3.2 v1(80.47,29.18) 80.47,30.86 80.72,31.11 84.25,31.11 84.43,30.93 CT4.2 ; DT3.1 v1(54.71,63.83) ; UT2.E12 33.6,47.74 v1(33.6,47.77) ; UT2.D10 v1(31.7,45.74)
  GND w0.152: v1(31.7,41.84) 32.16,41.84 32.22,41.9 32.22,42.04 32.5,42.32 33.04,42.32 33.22,42.14 33.22,41.5 33.45,41.27 33.51,41.33 33.91,41.33 34.19,41.04 34.19,39.36 v1(34.7,38.84) 34.19,38.33 33.22,38.33 v1(32.71,38.84) 32.71,38.38 32.56,38.24 32.49,38.24 32.21,37.96 32.21,36.8 v1(29.67,36.8) 29.67,38.8 v1(30.71,39.84) ; v1(42.63,47.75) 43.48,47.75 43.64,47.6 43.64,46.33 43.55,46.24 42.06,46.24 v1(41.58,45.76)
  GND w0.254: UT6.2 55.7,19.27 ; UT6.2 55.7,17.51 ; UT6.2 54.82,18.39 ; UT6.2 56.58,18.39 ; 77.05,73 UT1.3 ; UT1.3 78.81,73 ; UT1.3 77.93,73.88 ; UT1.3 77.93,72.12 ; UT8.10 20.14,16.1 ; UT8.10 20.14,14.33 ; UT8.10 19.26,15.21 ; UT8.10 21.02,15.21 ; UT1.50 19.51,71.34 ; UT1.50 19.51,69.58 ; UT1.50 20.39,70.46 ; UT1.50 18.63,70.46 ; UT4.48 90.63,68.8 ; UT4.48 89.75,67.92 ; UT4.48 91.51,67.92 ; UT4.48 90.63,67.04 ; UT6.10 56.58,28.55 ; UT6.10 55.7,27.67 ; UT6.10 55.7,29.43 ; UT6.10 54.82,28.55 ; 5.93,70.46 UT3.50 ; UT3.50 6.81,69.58 ; UT3.50 7.69,70.46 ; UT3.50 6.81,71.34 ; 29.42,15.21 UT8.2 31.18,15.21
  BOTTOM w0.254: 75.39,46.96 75.39,46.87 75.32,46.81 75.32,46.49 75.39,46.42 75.39,46.33 ; 75.39,46.96 75.7,46.65 ; 75.39,46.96 75.39,50.86 74.69,51.56 CB1.2 ; RB2.2 43.95,28.23 v1(45.54,26.64) ; 70.69,36.65 68.64,34.6 56.24,34.6 v1(55.7,35.13) 55.07,35.77 CB7.2 ; 70.69,36.65 69.97,36.65 69.71,36.9 69.71,42.16 ; 70.69,36.65 CB5.2 ; UB3.1 62.45,38.47 63.47,39.5 64.43,39.5 ; 75.39,46.33 73.39,46.33 69.83,42.77 CB3.2 69.83,42.27 69.71,42.16 ; 75.39,46.33 75.7,46.65 ; CB8.2 31.57,22.83 30.3,21.56 v1(29.03,21.56) 28.67,21.93 28.55,21.93 UB4.2 ; UB1.1 66.1,50.54 65.45,49.88 63.53,49.88 63.32,49.67 CB2.2 63.32,40.61 64.43,39.5 ; 75.7,46.65 81.1,41.25 CB4.2 80.85,39.5 79.69,38.33 78.98,38.33 78.32,37.68 UB2.1 ; 69.71,42.16 68.81,41.25 67.77,41.25 67.13,40.61 67.13,39.75 66.88,39.5 CB6.2 64.43,39.5 ; v1(40.46,15.85) 39.82,16.49 RB6.2
  vias: v1(33.33,33.14)
VBUS: length 23.1
  TOP w0.254: SWT1.5 71.29,19.5 70.29,19.5 SWT1.2 67.98,13.31 75.07,13.31 78.31,10.06 UT10.1
VCC: length 78
  TOP w0.254: v1(79.79,52.04) 83.64,55.89 RT4.1 ; CT5.1 CT6.1 CT9.1 v1(65.23,23.47) ; UT7.16 75.34,20.92 75.34,21.17 75.33,21.18 v1(75.33,21.69)
  POWER w0.254: UT4.49 94.05,70.46 ; UT4.49 93.17,71.34 ; UT4.49 93.17,69.58 ; SWT1.3 67.02,17.75 ; SWT1.3 65.05,17.75 ; SWT1.3 66.04,16.77 ; SWT1.3 66.04,18.74 ; SWT1.6 73.02,17.75 ; SWT1.6 71.05,17.75 ; SWT1.6 72.04,16.77 ; SWT1.6 72.04,18.74 ; UT1.49 19.51,73.88 ; UT1.49 19.51,72.12 ; UT1.49 20.39,73 ; UT1.49 18.63,73 ; 80.47,69.58 UT1.2 ; UT1.2 81.35,70.46 ; UT1.2 79.59,70.46 ; UT9.1 19.56,7.02 19.56,7.59 19.27,7.88 18.47,7.88 17.89,8.46 17.89,9.27 18.47,9.85 19.22,9.85 21.41,12.04 21.41,20.93 24.55,24.07 v1(28.44,24.07)
  BOTTOM w0.254: DB1.2 77.29,49.54 v1(79.79,52.04) ; UB4.4 v1(28.44,24.07) ; v1(66.5,35.53) 67.65,35.53 69.04,36.92 69.04,38.71 68.36,39.39 DB3.2 ; v1(82.37,35.53) 84.28,35.53 84.73,35.99 84.73,38.89 84.23,39.39 DB2.2
VCCA: length 135.7
  TOP w0.152: UT2.L5 v1(39.6,39.84) ; UT2.F12 34.6,47.74 v1(34.63,47.74) ; UT2.H12 v1(35.7,47.74)
  TOP w0.254: RT5.2 39.51,12.99 v1(39.83,12.67) ; RT2.1 71.26,35.22 v1(70.94,35.53)
  POWER w0.152: 40.12,42.68 39.85,42.41 39.85,42.36 ; 40.12,42.68 40.12,43.04 40.14,43.07 40.14,43.07 40.08,43.13 40.08,43.36 ; 40.12,42.68 40.12,42.62 39.85,42.36 ; 40.08,43.36 40.19,43.46 42.54,43.46 42.87,43.79 47.45,43.79 ; 40.08,43.36 39.08,44.36 39.08,44.94 38.8,45.22 38.22,45.22 v1(35.7,47.74) ; 41.27,43.32 41.12,43.17 ; 39.85,42.36 39.93,42.36 40.08,42.21 40.08,40.33 v1(39.6,39.84)
  POWER w0.254: UT6.4 55.7,21.81 ; UT6.4 56.58,20.93 ; UT6.4 55.7,20.05 ; UT6.4 56.68,19.95 60.44,19.95 62.05,21.56 62.05,38.71 63.96,40.61 72.85,40.61 v1(72.85,35.53) ; UT6.4 52.32,20.93 49.99,23.27 49.99,42.31 48.51,43.79 47.45,43.79 ; UT9.3 20.26,7.48 20.26,9.62 22.68,12.04 24.59,12.04 UT8.4 ; 26.88,15.21 UT8.4 ; UT8.4 27.76,14.33 ; UT8.4 27.76,16.1 ; UT8.4 28.64,15.21
  BOTTOM w0.254: RB4.2 43.44,19.98 43.76,19.66 v1(44.27,19.66) ; 72.21,39.5 74.2,39.5 76.02,37.68 ; 72.21,39.5 72.21,36.17 v1(72.85,35.53) ; 72.21,39.5 CB5.1 ; UB2.2 76.02,37.68 ; 76.02,37.68 UB2.4
VCCINT: length 151.2
  TOP w0.152: UT2.K7 37.67,41.81 36.67,41.81 UT2.H6 UT2.G6 UT2.G7 35.15,42.75 35.16,42.76 35.16,43.28 UT2.G8 ; UT2.G8 v1(35.6,43.74) ; UT2.G8 UT2.G9 UT2.G10 35.82,45.96 35.83,45.96 UT2.H11 ; UT2.N4 v1(41.6,38.84)
  TOP w0.254: v1(54.43,59.66) 54.43,59.03 55.38,58.08 RT3.1 ; UT2.D13 v1(31.7,48.74)
  POWER w0.152: 47.45,45.06 43,45.06 42.78,45.28 42.42,45.28 42.14,45.56 42.14,45.93 41.81,46.25 41.4,46.25 41.12,46.54 41.12,46.94 40.8,47.25 40.46,47.25 40.18,47.54 40.18,47.88 39.81,48.25 33.4,48.25 33.36,48.22 32.22,48.22 ; 41.1,39.34 36.34,39.34 36.64,39.65 36.64,39.87 36.19,40.33 35.5,40.33 35.27,40.56 35.27,43.41 v1(35.6,43.74) 34.08,45.26 33.51,45.26 33.22,45.54 33.22,45.94 32.91,46.25 32.5,46.25 32.22,46.54 32.22,48.22 ; 41.1,39.34 41.1,42.02 41.44,42.36 42.8,42.36 42.96,42.52 47.45,42.52 ; 41.1,39.34 v1(41.6,38.84) ; 32.22,48.22 v1(31.7,48.74)
  POWER w0.254: 47.45,42.52 49.2,42.52 49.35,42.37 49.35,27.28 46.18,24.1 36.4,24.1 33.22,20.93 24.21,20.93 23.95,20.68 23.95,13.94 UT9.2 ; v1(57.61,35.13) 57.61,38.8 54.37,42.04 53.91,42.04 53.46,41.59 53.32,41.72 53.32,42.09 53.46,42.22 50.62,45.06 47.45,45.06
  BOTTOM w0.254: UB3.4 60.15,39.98 ; 60.15,39.98 UB3.2 ; 60.15,39.98 59.67,39.5 55.32,39.5 ; 55.32,39.5 56.34,38.48 56.34,36.4 v1(57.61,35.13) ; 55.32,39.5 CB7.1
VCCIO: length 162
  TOP w0.152: UT2.T16 v1(44.6,51.74) ; UT2.P7 42.54,41.9 42.54,41.83 v1(42.56,41.81) ; UT2.P4 v1(42.6,38.84) ; UT2.C4 v1(30.71,38.84) ; UT2.P13 42.6,48.74 v1(42.6,48.74) ; v1(30.77,48.75) 30.77,48.67 UT2.C13 ; UT2.E3 32.69,37.83 v1(32.69,37.76) ; UT2.G3 v1(34.7,37.84) ; UT2.M14 v1(40.6,49.74) ; UT2.K3 v1(38.6,37.84) ; UT2.T1 44.57,35.87 v1(44.63,35.87) ; 25.6,33.67 v1(26.45,33.67) ; UT2.G14 v1(34.7,49.74) ; UT2.P10 42.15,45.29 v1(42.62,45.76) ; UT2.M3 v1(40.6,37.84) ; UT2.K14 v1(38.6,49.74)
  TOP w0.254: UT2.E14 v1(32.71,48.84) ; UT5.8 32.87,31.09 v1(32.23,30.45) ; 37.92,30.92 37.49,30.49 37.28,30.49 36.65,29.86 DT8.1 34.88,29.86 34.83,29.82 UT5.7 ; 37.92,30.92 v1(37.92,29.82) ; 37.92,30.92 DT6.1 ; UT2.A16 28.83,51.61 v1(28.55,51.61) ; v1(30.75,41.81) 30.77,41.83 30.77,41.9 UT2.C7 ; v1(28.7,35.84) UT2.A1 ; v1(80.47,58.39) 80.15,58.08 RT1.1 ; UT7.4 v1(79.83,17.12) ; DT5.1 25.6,33.67 ; DT7.1 25.09,26.6 25.73,27.23 25.73,27.95 26.33,28.55 UT5.3 27.91,28.55 v1(28.4,29.04) ; UT2.C10 v1(30.71,45.74)
  POWER w0.152: v1(44.63,35.87) 44.63,36.81 v1(42.6,38.84) ; v1(30.71,45.74) 31.19,46.22 31.19,48.34 v1(30.77,48.75) ; v1(34.7,49.74) 34.22,49.25 33.12,49.25 v1(32.71,48.84) 32.33,49.22 31.24,49.22 v1(30.77,48.75) ; v1(42.62,45.76) 42.62,45.87 42.15,46.35 42.15,48.29 v1(42.6,48.74) ; v1(42.6,38.84) 42.12,38.36 41.11,38.36 v1(40.6,37.84) 40.12,38.33 39.08,38.33 v1(38.6,37.84) ; v1(42.6,38.84) 42.12,39.32 42.12,41.37 v1(42.56,41.81) ; v1(28.7,35.84) 28.7,36.84 v1(30.71,38.84) ; v1(30.77,48.75) 28.55,50.98 v1(28.55,51.61) ; v1(42.6,48.74) 42.08,49.26 42.08,49.94 41.8,50.22 41.08,50.22 v1(40.6,49.74) 40.12,50.22 39.08,50.22 v1(38.6,49.74) ; v1(42.6,48.74) 44.6,50.74 v1(44.6,51.74) ; v1(30.71,38.84) 31.22,39.36 31.22,41.33 v1(30.75,41.81) 30.22,42.33 ; v1(30.71,38.84) 31.22,38.33 32.12,38.33 v1(32.69,37.76) 33.26,38.33 34.22,38.33 v1(34.7,37.84)
  POWER w0.254: 22.05,69.58 UT1.48 ; UT1.48 22.05,71.34 ; UT1.48 22.93,70.46 ; UT4.50 90.63,71.34 ; UT4.50 90.63,69.58 ; UT4.50 89.75,70.46 ; UT1.1 81.35,73 ; UT1.1 80.47,73.88 ; UT1.1 79.59,73 ; v1(46.18,16.48) 46.18,13.94 43,10.77 v1(33.48,10.77) 23.32,10.77 UT9.4
  BOTTOM w0.254: CB1.1 70.22,48.71 68.4,50.54 ; 68.4,50.54 UB1.4 68.4,44.19 66.98,42.77 CB3.1 ; 68.4,50.54 UB1.2 68.39,51.15 68.03,51.15 v1(67.13,52.04) ; RB1.1 37.61,65.69 37.29,65.38 v1(36.65,65.38) ; RB5.1 47.01,16.8 46.69,16.48 v1(46.18,16.48) 46.18,19.66 44.91,20.93 37.9,20.93 37.58,21.25 37.58,28.97 37.92,29.31 v1(37.92,29.82) ; RB7.1 34.43,11.72 v1(33.48,10.77)
A2: length 44.5
  TOP w0.152: 25.6,37.29 UT2.A2
  TOP w0.254: 25.6,37.29 16.21,37.29 15.95,37.04 15.95,12.81 15.18,12.04 UT3.3
A3: length 42.9
  TOP w0.152: UT2.A3 25.6,38.29
  TOP w0.254: UT3.5 14.37,14.58 15.14,15.35 15.14,38.04 15.39,38.29 25.6,38.29
A4: length 38.6
  TOP w0.152: UT2.A4 29.02,39.29 28.99,39.32 25.6,39.32
  TOP w0.254: 25.6,39.32 14.61,39.32 14.33,39.03 14.33,20.83 13.16,19.66 UT3.9
A5: length 37.9
  TOP w0.152: 25.6,40.29 UT2.A5
  TOP w0.254: 25.6,40.29 14.1,40.29 13.51,39.7 13.51,27.63 11.77,25.89 8.79,25.89 8.08,25.18 8.08,23.47 UT3.12
A6: length 32.3
  TOP w0.152: 25.6,41.29 UT2.A6
  TOP w0.254: 25.6,41.29 13.83,41.29 12.7,40.16 12.7,28.73 11.25,27.28 UT3.15
A7: length 27.3
  TOP w0.152: 25.6,42.29 UT2.A7
  TOP w0.254: UT3.19 11.89,34.9 11.89,40.61 13.56,42.29 25.6,42.29
A8: length 25.9
  TOP w0.152: 25.6,43.29 UT2.A8
  TOP w0.254: UT3.21 10.73,36.29 10.73,40.73 13.29,43.29 25.6,43.29
A9: length 22.1
  TOP w0.152: 25.6,44.29 UT2.A9
  TOP w0.254: UT3.25 9.35,40.93 12.7,44.29 25.6,44.29
A10: length 19.9
  TOP w0.152: 25.6,45.29 UT2.A10
  TOP w0.254: 25.6,45.29 10.53,45.29 10.3,45.06 UT3.29
A11: length 20.3
  TOP w0.152: 25.6,46.29 UT2.A11
  TOP w0.254: 25.6,46.29 10.66,46.29 UT3.31
A12: length 23.2
  TOP w0.152: UT2.A12 25.6,47.29
  TOP w0.254: 25.6,47.29 12.83,47.29 10.33,49.79 10.33,51.7 UT3.35
A13: length 25.2
  TOP w0.152: 25.6,48.29 UT2.A13
  TOP w0.254: 25.6,48.29 15.7,48.29 9.75,54.24 7.79,54.24 UT3.38
A14: length 28.6
  TOP w0.152: 25.6,49.29 UT2.A14
  TOP w0.254: UT3.40 7.79,58.74 9.75,58.74 10.73,57.76 10.73,54.41 15.85,49.29 25.6,49.29
A15: length 30.5
  TOP w0.152: 25.6,50.29 UT2.A15
  TOP w0.254: UT3.44 8.08,61.57 9.98,61.57 11.89,59.66 11.89,54.58 16.18,50.29 25.6,50.29
ASDI_PAGE: length 41.2
  TOP w0.152: UT2.C1 31.15,35.82 29.62,34.29 v1(29.51,34.29) 28.67,34.29 27.25,32.87
  TOP w0.254: UT8.9 19.06,18.83 19.06,30.81 19.98,31.72 CT1.1 22.05,31.72 22.73,31.05 DT5.2 25.43,31.05 27.25,32.87 ; UT5.5 34.03,26.56 v1(33.48,26.01)
  BOTTOM w0.152: 32.85,32.87 31.43,34.29 v1(29.51,34.29)
  BOTTOM w0.254: v1(33.48,26.01) 33.48,32.24 32.85,32.87
B1: length 45.5
  TOP w0.152: 25.6,35.53 25.77,35.36 29.22,35.36 UT2.B1
  TOP w0.254: 25.6,35.53 25.19,35.94 18.42,35.94 16.36,33.88 16.36,11.53 14.32,9.5 UT3.1
B3: length 47.8
  TOP w0.152: UT2.B3 29.67,37.81 25.6,37.81
  TOP w0.254: 25.6,37.81 15.8,37.81 15.54,37.56 15.54,14.42 14.43,13.31 8.08,13.31 UT3.6
B4: length 44.2
  TOP w0.152: UT2.B4 29.63,38.77 25.6,38.77
  TOP w0.254: 25.6,38.77 14.99,38.77 14.73,38.52 14.73,18.64 14.48,18.39 8.08,18.39 UT3.10
B5: length 35.1
  TOP w0.152: 25.6,39.81 29.67,39.81 UT2.B5
  TOP w0.254: 25.6,39.81 14.26,39.81 13.92,39.47 13.92,26.14 12.52,24.74 UT3.13
B6: length 37
  TOP w0.152: 25.6,40.81 29.67,40.81 UT2.B6
  TOP w0.254: 25.6,40.81 13.99,40.81 13.11,39.93 13.11,27.86 11.54,26.3 7.79,26.3 UT3.16
B7: length 32.1
  TOP w0.152: UT2.B7 29.67,41.81 25.6,41.81
  TOP w0.254: UT3.20 7.79,31.38 9.75,31.38 12.29,33.92 12.29,40.39 13.72,41.81 25.6,41.81
B8: length 30.7
  TOP w0.152: UT2.B8 29.67,42.81 25.6,42.81
  TOP w0.254: 25.6,42.81 13.45,42.81 11.25,40.61 11.25,35.42 9.75,33.92 7.79,33.92 UT3.22
B9: length 26.8
  TOP w0.152: 25.6,43.76 25.77,43.76 25.8,43.79 29.65,43.79 UT2.B9
  TOP w0.254: 25.6,43.76 13.13,43.76 10.33,40.96 10.33,39.57 9.75,39 7.79,39 UT3.26
B10: length 24.6
  TOP w0.152: UT2.B10 29.67,44.81 25.6,44.81
  TOP w0.254: UT3.30 8.21,43.66 9.85,43.66 11.01,44.81 25.6,44.81
B11: length 24.3
  TOP w0.152: 25.6,45.77 29.63,45.77 UT2.B11
  TOP w0.254: 25.6,45.77 10.02,45.77 9.75,46.04 8.37,46.04 UT3.32
B12: length 26.4
  TOP w0.152: 25.6,47.77 29.5,47.77 29.98,47.29 UT2.B12
  TOP w0.254: UT3.36 7.79,53.66 9.75,53.66 15.64,47.77 25.6,47.77
B13: length 26.2
  TOP w0.152: 25.6,48.81 29.63,48.81 UT2.B13
  TOP w0.254: 25.6,48.81 15.76,48.81 10.33,54.24 10.33,55.82 9.35,56.8 UT3.39
B14: length 27.6
  TOP w0.152: 25.6,49.77 29.67,49.77 UT2.B14
  TOP w0.254: 25.6,49.77 16.07,49.77 11.14,54.7 11.14,58.51 UT3.41
B16: length 33.6
  TOP w0.152: UT2.B16 29.35,52.09 25.6,52.09
  TOP w0.254: UT3.47 12.29,64.97 12.29,54.81 15.02,52.09 25.6,52.09
C2: length 49.7
  TOP w0.152: 25.6,34.95 25.77,34.95 25.8,34.98 29.68,34.98 30.67,35.97 30.67,36.81 UT2.C2
  TOP w0.254: v1(16.97,12.04) 16.97,12.55 16.76,12.75 16.76,33.42 18.87,35.53 25.02,35.53 25.6,34.95
  BOTTOM w0.254: v1(16.97,12.04) 15.06,12.04 14.73,12.37 14.71,12.37 14.39,12.68 14.3,12.68 14.11,12.87 14.11,12.99 13.75,13.35 8.12,13.35 UT3.4
C3: length 40
  TOP w0.152: v1(30.77,37.83) 30.81,37.86 30.81,37.94 UT2.C3
  BOTTOM w0.152: 25.6,37.83 v1(30.77,37.83)
  BOTTOM w0.254: 25.6,37.83 25.48,37.83 24.41,36.76 24.41,22.67 23.54,21.79 12.12,21.79 10.62,20.29 10.62,18.39 UT3.7
C6: length 41.5
  TOP w0.254: UT2.C6 v1(30.71,40.84)
  BOTTOM w0.152: 25.6,40.84 v1(30.71,40.84)
  BOTTOM w0.254: 25.6,40.84 23.89,40.84 22.78,39.74 22.78,24.54 22.53,24.28 12.46,24.28 11.07,25.67 11.07,28.09 UT3.17
C8: length 48.8
  TOP w0.254: UT2.C8 v1(30.71,42.84)
  BOTTOM w0.152: v1(30.71,42.84) 25.6,42.84
  BOTTOM w0.254: 25.6,42.84 24.16,42.84 21.56,40.25 21.56,25.46 21.36,25.26 12.64,25.26 11.89,26.01 11.89,35.85 10.3,37.44 UT3.23
C9: length 22.9
  TOP w0.254: UT2.C9 v1(30.71,44.74)
  BOTTOM w0.152: 25.6,44.74 v1(30.71,44.74)
  BOTTOM w0.254: UT3.27 11.56,44.74 25.6,44.74
C11: length 23.4
  TOP w0.152: 25.6,46.77 30.67,46.77 v1(30.71,46.74)
  TOP w0.254: UT2.C11 v1(30.71,46.74) ; 25.6,46.77 12.72,46.77 UT3.33
C14: length 34.8
  TOP w0.152: v1(30.71,49.74) 30.78,49.74 30.94,49.58 30.94,49.5 UT2.C14
  BOTTOM w0.152: v1(30.71,49.74) 30.71,54.71
  BOTTOM w0.254: UT3.42 8.08,59.03 9.98,59.03 12.52,61.57 25.34,61.57 30.71,56.2 30.71,54.71
C15: length 34.8
  TOP w0.152: 25.6,52.68 29.89,52.68 30.67,51.89 30.67,51.09 31.15,50.61 UT2.C15
  TOP w0.254: v1(12.7,65.38) 12.7,55.04 15.06,52.68 25.6,52.68
  BOTTOM w0.254: v1(12.7,65.38) UT3.45
C16: length 39.4
  TOP w0.152: UT2.C16 31.15,52.53 30.59,53.09 25.6,53.09
  TOP w0.254: UT3.48 8.08,69.19 10.04,69.19 13.23,66 13.23,55.14 15.29,53.09 25.6,53.09
CLK: length 12.4
  TOP w0.152: UT2.E1 32.83,35.96 32.83,35.75 v1(30.85,33.77)
  BOTTOM w0.152: 29.95,32.87 v1(30.85,33.77)
  BOTTOM w0.254: 29.95,32.87 29.35,32.27 RB3.1 31.09,27.91 CB8.1
CONF_DONE_PAGE: length 103.3
  TOP w0.152: 36.65,54.71 36.65,49.79 UT2.H14
  TOP w0.254: UT1.32 42.37,69.19 41.73,68.55 37.54,68.55 36.02,67.03 36.02,55.35 36.65,54.71
  GND w0.254: UT8.3 23.95,21.56 23.95,62.84 25.22,64.11 41.73,64.11 42.37,64.74 UT1.32
  BOTTOM w0.254: RB1.2 39.51,67.6 UT1.32
D1: length 56.3
  TOP w0.152: 29.67,32.87 29.67,33.27 30.65,34.25 30.72,34.25 32.15,35.68 UT2.D1
  TOP w0.254: 29.67,32.87 29.67,18.92 29.32,18.57 29.32,16.94 29.67,16.59 29.67,15.97 29.32,15.62 29.32,14.81 29.67,14.46 29.67,10.89 28.05,9.27 28.05,6.5 26.61,5.05 10.3,5.05 6.81,8.54 UT3.2
D3: length 45.2
  TOP w0.152: UT2.D3 v1(31.7,37.84)
  BOTTOM w0.152: v1(31.7,37.84) 31.19,37.33 25.7,37.33 25.6,37.23
  BOTTOM w0.254: UT3.8 8.08,15.85 9.98,15.85 11.25,17.12 11.25,20.29 12.34,21.39 23.71,21.39 24.82,22.5 24.82,36.44 25.6,37.23
D4: length 38.5
  TOP w0.152: UT2.D4 v1(31.7,38.84)
  BOTTOM w0.152: v1(31.7,38.84) 31.17,38.31 25.6,38.31
  BOTTOM w0.254: 25.6,38.31 24.82,38.31 24,37.49 24,22.84 23.37,22.2 UT3.11
D5: length 41.8
  TOP w0.152: UT2.D5 v1(31.7,39.84)
  BOTTOM w0.152: v1(31.7,39.84) 31.21,39.34 25.6,39.34
  BOTTOM w0.254: UT3.14 8.08,23.47 23.36,23.47 23.6,23.71 23.6,38.99 23.95,39.34 25.6,39.34
D6: length 45.3
  TOP w0.254: UT2.D6 v1(31.7,40.84)
  BOTTOM w0.152: 25.6,40.36 25.61,40.36 31.22,40.36 v1(31.7,40.84)
  BOTTOM w0.254: 25.6,40.36 24.39,40.36 23.19,39.16 23.19,24.11 22.95,23.88 12.29,23.88 10.67,25.5 10.67,27.92 10.04,28.55 8.08,28.55 UT3.18
D8: length 52.7
  TOP w0.254: UT2.D8 v1(31.7,42.84)
  BOTTOM w0.152: v1(31.7,42.84) 31.19,42.32 25.6,42.32
  BOTTOM w0.254: UT3.24 6.81,36.42 7.06,36.17 9.98,36.17 11.48,34.67 11.48,25.84 12.56,24.76 21.44,24.76 21.97,25.29 21.97,40.08 24.22,42.32 25.6,42.32
D9: length 27.5
  TOP w0.254: UT2.D9 v1(31.7,44.74)
  BOTTOM w0.152: 25.6,44.25 31.21,44.25 v1(31.7,44.74)
  BOTTOM w0.254: 25.6,44.25 13.61,44.25 10.62,41.25 8.08,41.25 UT3.28
D11: length 44.7
  TOP w0.254: UT2.D11 v1(31.7,46.74)
  BOTTOM w0.152: v1(31.7,46.74) 31.22,47.22 30.51,47.22 29.03,48.69 29.03,54.08 29.67,54.71
  BOTTOM w0.254: 29.67,54.71 29.67,56.09 25.45,60.3 12.52,60.3 11.25,59.03 11.25,52.04 10.62,51.41 8.08,51.41 UT3.34
D12: length 36.7
  TOP w0.254: UT2.D12 v1(31.7,47.74)
  BOTTOM w0.152: 30.22,54.71 30.22,48.62 30.57,48.27 31.17,48.27 v1(31.7,47.74)
  BOTTOM w0.254: 30.22,54.71 30.22,56.11 25.39,60.93 12.52,60.93 10.62,59.03 10.62,56.49 UT3.37
D14: length 32
  TOP w0.254: v1(31.71,49.75) 31.71,49.73 UT2.D14
  BOTTOM w0.152: v1(31.71,49.75) 31.54,49.92 31.54,49.94 31.22,50.25 31.22,54.71
  BOTTOM w0.254: UT3.43 10.02,62.16 25.32,62.16 31.22,56.26 31.22,54.71
D15: length 34.9
  TOP w0.152: UT2.D15 v1(31.7,50.74)
  BOTTOM w0.152: v1(31.7,50.74) 31.7,54.71
  BOTTOM w0.254: 31.7,54.71 31.7,56.35 25.22,62.84 12.52,62.84 11.25,64.11 8.08,64.11 UT3.46
D16: length 37.9
  TOP w0.152: 25.6,53.49 31.39,53.49 31.83,53.06 31.83,51.62 UT2.D16
  TOP w0.254: UT3.49 13.79,66.01 13.79,55.22 15.52,53.49 25.6,53.49
D+: length 5.5
  TOP w0.305: UT7.5 81.1,13.31 80.47,12.67 UT10.3
D-: length 11.2
  TOP w0.305: UT10.2 79.67,8.92 80.08,8.51 82.46,8.51 82.73,8.77 82.73,14.97 82.42,15.27 UT7.6
DATA_PAGE: length 50.4
  TOP w0.152: UT2.H2 35.67,36.81 35.67,35.64 35.49,35.64 34.11,34.26 34.11,32.99 33.99,32.87
  TOP w0.254: 33.99,32.87 32.79,31.67 32.31,31.67 31.7,31.06 31.7,25.25 32.2,24.74 v1(33.48,24.74) 34.02,24.74 34.18,24.89 CT7.1 35.38,26.39 36.02,27.03 DT8.2 ; 25.62,29.55 25.26,29.19 25.26,28.59 24.59,27.91 20.78,27.91 20.14,27.28 20.14,20.29 UT8.7 ; 25.62,29.55 25.62,29.57 25.88,29.82 UT5.2 ; 25.62,29.55 25.76,29.42 v1(25.76,29.18)
  GND w0.254: v1(25.76,29.18) 25.76,28.65 26.59,27.81 26.71,27.81 27.03,27.5 27.03,27.38 28.08,26.33 28.08,26.32 27.98,26.23 27.98,25.79 28.3,25.48 28.74,25.48 28.83,25.57 28.83,25.57 29.66,24.74 v1(33.48,24.74)
DCLK_PAGE: length 32.2
  TOP w0.152: 38.05,32.87 36.15,34.76 UT2.H1
  TOP w0.254: DT6.2 35.68,28.51 35.64,28.46 35.19,28.46 35.11,28.55 UT5.6 32.87,28.55 v1(32.23,29.18) ; DT6.2 CT8.1 ; DT6.2 38.43,28.51 39.19,29.27 39.19,31.72 38.05,32.87
  BOTTOM w0.254: UT8.1 32.84,20.29 32.84,28.55 32.59,28.8 32.59,28.82 v1(32.23,29.18)
E5: length 41.1
  TOP w0.152: UT2.E5 v1(32.71,39.84)
  BOTTOM w0.152: v1(32.71,39.84) 32.19,39.32 32.19,37.64 30.87,36.32 28.91,36.32 28.91,36.32 26.64,36.32 25.6,35.28
  BOTTOM w0.254: 25.6,35.28 25.22,34.9 25.22,22.33 23.95,21.06 23.95,10.25 22.97,9.27 22.97,8.46 23.95,7.48 23.95,6.32
E6: length 43.8
  TOP w0.152: UT2.E6 v1(32.71,40.84)
  TOP w0.254: 23.95,8.86 23.95,9.82 23.66,10.11 23.66,23.91 22.76,24.82 v1(22.25,24.82)
  BOTTOM w0.152: v1(32.71,40.84) 32.22,41.33 25.6,41.33
  BOTTOM w0.254: v1(22.25,24.82) 22.38,24.94 22.38,39.91 23.79,41.33 25.6,41.33
E7: length 53
  TOP w0.152: UT2.E7 v1(32.71,41.84)
  TOP w0.254: 26.49,6.32 26.49,7.48 27.47,8.46 27.47,9.27 26.49,10.25 26.49,23.59 23.43,26.64 21.83,26.64 21.83,26.65 v1(21.03,26.65)
  BOTTOM w0.152: 25.6,43.32 31.9,43.32 32.21,43.02 32.21,42.34 v1(32.71,41.84)
  BOTTOM w0.254: 25.6,43.32 24.06,43.32 21.03,40.29 v1(21.03,26.65)
E8: length 50.5
  TOP w0.152: UT2.E8 v1(32.71,42.84)
  TOP w0.254: 26.49,8.86 24.24,11.12 24.24,25.26 23.51,25.99 v1(21.03,25.99)
  BOTTOM w0.152: 25.6,43.79 32.21,43.79 32.71,43.3 v1(32.71,42.84)
  BOTTOM w0.254: v1(21.03,25.99) 20.83,25.99 20.43,26.38 20.43,40.27 23.95,43.79 25.6,43.79
E9: length 37.5
  TOP w0.152: UT2.E9 v1(32.71,44.74)
  TOP w0.254: UT1.43 25.86,71.73 25.86,60.96 v1(24.56,59.66)
  BOTTOM w0.152: v1(32.71,44.74) 32.22,45.22 25.6,45.22
  BOTTOM w0.254: 25.6,45.22 25.06,45.22 24.56,45.72 v1(24.56,59.66)
E10: length 33.2
  TOP w0.152: UT2.E10 v1(32.71,45.74)
  TOP w0.254: UT1.44 27.13,60.3 v1(25.22,58.39)
  BOTTOM w0.152: 25.6,46.28 25.63,46.25 32.19,46.25 v1(32.71,45.74)
  BOTTOM w0.254: v1(25.22,58.39) 25.22,46.53 25.48,46.28 25.6,46.28
E11: length 33.9
  TOP w0.152: UT2.E11 v1(32.71,46.74)
  BOTTOM w0.152: v1(32.71,46.74) 32.71,47.19 32.84,47.33 32.84,48.02 32.22,48.64 32.22,49.04 32.84,49.66 32.84,54.71
  BOTTOM w0.254: UT1.45 25.86,71.73 25.86,69.19 26.49,68.55 31.57,68.55 32.84,67.28 32.84,54.71
E15: length 31.1
  TOP w0.152: UT2.E15 33.63,50.77 33.63,54.71
  TOP w0.254: UT1.46 22.05,67.92 22.05,59.61 23.89,57.76 32.21,57.76 33.63,56.33 33.63,54.71
E16: length 32
  TOP w0.152: UT2.E16 33.15,54.71
  TOP w0.254: UT1.47 22.05,71.85 21.07,70.87 21.07,70.05 21.41,69.71 21.41,59.66 23.95,57.12 32.21,57.12 33.15,56.18 33.15,54.71
F1: length 33.5
  TOP w0.152: UT2.F1 34.15,35.81 31.21,32.87
  TOP w0.254: UT9.9 30.59,7.88 30.59,9.27 32.21,10.89 32.21,18.39 30.48,20.12 30.48,32.14 31.21,32.87
F2: length 31.8
  TOP w0.152: 30.63,32.87 33.63,35.86 33.63,36.77 UT2.F2
  TOP w0.254: UT9.10 31.57,11.4 31.57,18.39 30.07,19.89 30.07,32.31 30.63,32.87
F3: length 34.7
  TOP w0.152: UT2.F3 v1(33.71,37.84)
  BOTTOM w0.152: 34.47,32.87 34.47,35.53 33.71,36.3 v1(33.71,37.84)
  BOTTOM w0.254: 34.47,32.87 34.48,26.29 34.48,16.85 30.3,12.67 30.3,7.59 UT9.11
F5: length 46.6
  TOP w0.152: UT2.F5 v1(33.71,39.84)
  GND w0.152: v1(33.71,39.84) 33.22,40.33 28.74,40.33 28.22,39.8 28.22,33.8 29.16,32.87
  GND w0.254: 29.16,32.87 30.93,31.1 v1(35.48,31.1)
  BOTTOM w0.254: 34.11,6.32 35.41,7.62 35.41,9.58 35.95,10.13 35.95,30.63 v1(35.48,31.1)
F6: length 44.7
  TOP w0.152: UT2.F6 v1(33.71,40.84)
  GND w0.152: v1(33.71,40.84) 33.39,40.84 32.91,41.33 30.38,41.33 30.3,41.25 29.03,41.25 27.76,39.98 27.76,33.63 28.52,32.87
  GND w0.254: 28.52,32.87 30.7,30.69 31.21,30.69 31.99,29.92 32.45,29.92 32.77,30.23 32.77,30.44 33.02,30.69 33.72,30.69 v1(35.42,28.99)
  BOTTOM w0.254: v1(35.42,28.99) 35.42,10.17 34.11,8.86
F7: length 39.3
  TOP w0.152: UT2.F7 v1(33.71,41.84)
  GND w0.152: v1(35.36,34.26) 35.36,34.74 35.22,34.88 35.22,40.04 35.38,40.2 35.38,41.8 35.34,41.84 v1(33.71,41.84)
  BOTTOM w0.152: 35.36,32.87 v1(35.36,34.26)
  BOTTOM w0.254: 36.65,6.32 37.63,7.31 37.63,9.79 36.36,11.06 36.36,31.41 35.36,32.4 35.36,32.87
F8: length 37.3
  TOP w0.152: UT2.F8 v1(33.71,42.84)
  TOP w0.254: v1(32.84,17.12) 32.84,12.49 33.63,11.7 33.81,11.7 36.65,8.86
  BOTTOM w0.152: 34.01,32.87 34.01,34.9 33.22,35.69 33.22,42.36 v1(33.71,42.84)
  BOTTOM w0.254: v1(32.84,17.12) 34.01,18.29 34.01,32.87
F9: length 28.5
  TOP w0.152: UT2.F9 v1(33.71,44.74)
  BOTTOM w0.152: 35.8,54.71 35.8,48.33 36.19,47.94 36.19,47.54 35.87,47.22 35.4,47.22 35.14,46.96 35.14,46.17 v1(33.71,44.74)
  BOTTOM w0.254: UT1.36 35.9,69.07 35.9,67.74 35.8,67.64 35.8,65.85 35.71,65.77 35.71,64.99 35.8,64.9 35.8,54.71
F10: length 29.3
  TOP w0.152: UT2.F10 v1(33.71,45.74)
  BOTTOM w0.152: v1(33.71,45.74) 34.44,46.47 34.44,46.86 35.12,47.54 35.12,48.18 35.49,48.55 35.49,50.06 35.38,50.17 35.38,54.71
  BOTTOM w0.254: UT1.37 35.73,72.02 35.73,70.05 35.38,69.71 35.38,66.02 35.31,65.94 35.31,64.82 35.38,64.74 35.38,54.71
F11: length 25.4
  TOP w0.152: UT2.F11 v1(33.71,46.74)
  BOTTOM w0.152: v1(33.71,46.74) 34.15,47.18 34.15,48.08 34.39,48.33 34.83,48.33 35.19,48.68 35.19,49.94 34.75,50.38 34.75,54.71
  BOTTOM w0.254: 34.75,54.71 UT1.38
F13: length 26
  TOP w0.152: v1(33.67,48.74) 33.71,48.74 UT2.F13
  BOTTOM w0.152: 34.19,54.71 34.19,49.26 v1(33.67,48.74)
  BOTTOM w0.254: UT1.39 33.48,71.73 33.48,69.82 34.19,69.11 34.19,54.71
F14: length 22
  TOP w0.152: UT2.F14 v1(33.71,49.74)
  BOTTOM w0.152: v1(33.71,49.74) 33.71,54.71
  BOTTOM w0.254: UT1.40 33.71,68.96 33.71,54.71
F15: length 25
  TOP w0.152: 34.67,54.71 34.67,50.81 UT2.F15
  TOP w0.254: 34.67,54.71 34.67,66.61 30.65,70.63 30.65,72.02 UT1.41
F16: length 21
  TOP w0.152: 34.15,54.71 UT2.F16
  TOP w0.254: 34.15,54.71 34.15,65.97 UT1.42
G1: length 35.6
  TOP w0.152: UT2.G1 35.15,35.74 33.8,34.39 33.8,34.31 32.36,32.87
  TOP w0.254: 39.19,6.32 40.17,7.31 40.17,9.77 35.38,14.56 35.38,16.48 31.29,20.57 31.29,31.8 32.36,32.87
G2: length 33.6
  TOP w0.152: UT2.G2 34.67,36.81 34.67,35.75 31.79,32.87
  TOP w0.254: 39.19,8.86 34.75,13.31 34.75,16.49 30.89,20.35 30.89,31.97 31.79,32.87
G5: length 37.1
  TOP w0.152: UT2.G5 v1(34.7,39.84)
  BOTTOM w0.152: v1(34.7,39.84) 35.19,39.36 35.19,35.13 35.85,34.47 35.85,32.87
  BOTTOM w0.254: 35.85,32.87 35.85,32.67 36.76,31.76 36.76,14.47 40.46,10.77 40.46,7.59 41.73,6.32
G11: length 29.4
  TOP w0.152: UT2.G11 35.6,46.74 v1(35.63,46.74)
  BOTTOM w0.152: v1(35.63,46.74) 36.08,46.74 36.65,47.3 36.65,48.14 36.2,48.59 36.2,54.71
  BOTTOM w0.254: 36.2,54.71 36.2,65.07 36.12,65.16 36.12,65.6 36.2,65.68 36.2,67.47 38.56,69.82 38.56,71.73 UT1.33
G15: length 22.7
  TOP w0.152: UT2.G15 35.63,50.77 35.63,54.71
  TOP w0.254: 35.63,54.71 35.63,55.16 35.61,55.18 35.61,67.2 37.37,68.96 37.37,68.96 38.87,70.46 UT1.34
G16: length 22.6
  TOP w0.152: UT2.G16 35.15,54.71
  TOP w0.254: 35.15,54.71 35.15,68.96 36.02,69.82 36.02,71.73 UT1.35
J1: length 32.9
  TOP w0.152: 39.95,32.87 39.9,32.92 39.9,32.93 37.15,35.67 UT2.J1
  TOP w0.254: 39.95,32.87 40.12,32.7 40.12,17.16 43,14.28 43,7.59 UT9.21
J2: length 32.5
  TOP w0.152: UT2.J2 37.63,36.81 37.63,35.82 40.53,32.93 40.53,32.87
  TOP w0.254: UT9.22 45.66,10.25 45.66,12.2 40.53,17.33 40.53,32.87
J6: length 45.2
  TOP w0.152: UT2.J6 v1(37.6,40.84)
  BOTTOM w0.152: v1(37.6,40.84) 37.6,39.66 37.13,39.19 37.13,39.06 37.12,39.04 37.12,34.92 37.17,34.87 37.17,33.66 37.96,32.87
  BOTTOM w0.254: 37.96,32.87 40.46,30.37 40.46,29.43 40.72,29.17 46.19,29.17 49.99,25.38 49.99,11.4 48.08,9.5 48.08,7.59 46.81,6.32
J11: length 33.7
  TOP w0.152: UT2.J11 v1(37.6,46.74)
  TOP w0.254: v1(38.69,64.74) 39.32,65.38 44.91,65.38 UT1.26
  BOTTOM w0.152: 36.65,54.71 36.65,50.34 36.51,50.19 36.51,48.71 36.96,48.27 36.96,47.38 v1(37.6,46.74)
  BOTTOM w0.254: v1(38.69,64.74) 36.65,62.71 36.65,54.71
J12: length 32.1
  TOP w0.152: UT2.J12 v1(37.6,47.74)
  TOP w0.254: v1(44.27,67.94) 45.46,67.94 46.05,68.54 46.05,71.6 UT1.27
  BOTTOM w0.152: 37.11,54.71 37.11,50.36 36.81,50.06 36.81,48.84 37.27,48.38 37.27,48.06 v1(37.6,47.74)
  BOTTOM w0.254: 37.11,54.71 37.11,62.03 43.03,67.94 v1(44.27,67.94)
J13: length 27.9
  TOP w0.152: UT2.J13 v1(37.6,48.74)
  TOP w0.254: UT1.28 46.46,69.47 46.46,68.37 45.37,67.28 v1(43.64,67.28)
  BOTTOM w0.152: v1(37.6,48.74) 37.12,49.22 37.12,49.94 37.52,50.34 37.52,54.71
  BOTTOM w0.254: v1(43.64,67.28) 37.52,61.16 37.52,54.71
J14: length 29.1
  TOP w0.152: UT2.J14 v1(37.6,49.74)
  BOTTOM w0.152: 37.92,54.71 37.92,50.31 37.6,49.99 v1(37.6,49.74)
  BOTTOM w0.254: UT1.29 46.18,71.73 46.18,67.28 45.54,66.65 43.58,66.65 37.92,60.99 37.92,54.71
J15: length 24.5
  TOP w0.152: UT2.J15 37.67,50.81 37.67,54.71
  TOP w0.254: 37.67,54.71 37.67,65.19 39.13,66.65 41.1,66.65 UT1.30
J16: length 25.8
  TOP w0.152: UT2.J16 37.15,54.71
  TOP w0.254: 37.15,54.71 37.15,65.13 37.19,65.16 37.19,65.28 39.19,67.28 41.1,67.28 43.35,69.54 43.35,72.02 UT1.31
K1: length 31
  TOP w0.152: 40.93,32.87 40.93,33.05 38.15,35.83 UT2.K1
  TOP w0.254: 40.93,32.87 40.93,17.5 46.81,11.62 46.81,8.86
K2: length 35.6
  TOP w0.152: 41.34,32.87 41.34,33.39 38.63,36.09 38.63,36.81 UT2.K2
  TOP w0.254: 41.34,32.87 41.34,17.67 48.08,10.93 48.08,7.59 49.35,6.32
K5: length 36.9
  TOP w0.152: UT2.K5 v1(38.6,39.84)
  BOTTOM w0.152: 43.33,32.87 39.12,37.08 39.12,39.33 v1(38.6,39.84)
  BOTTOM w0.254: 49.35,8.86 50.39,9.91 50.39,25.81 43.33,32.87
K6: length 47.3
  TOP w0.152: UT2.K6 v1(38.6,40.84)
  GND w0.152: v1(38.6,40.84) 38.12,40.36 38.12,38.51 38.27,38.36 39.54,38.36 39.58,38.33 42.8,38.33 43.05,38.07 45.39,38.07 45.54,37.92 45.54,35.05 45.39,34.9 44.35,34.9 43.56,34.11 v1(43.56,33.46)
  BOTTOM w0.152: v1(43.56,33.46) 44.15,32.87
  BOTTOM w0.254: 51.89,6.32 50.8,7.42 50.8,26.22 44.15,32.87
K8: length 52.4
  TOP w0.152: UT2.K8 v1(38.6,42.84)
  GND w0.152: 47.45,32.87 47.45,33.4 ; 45.52,32.87 44.82,33.57 v1(44.21,33.57) ; 47.45,34 47.45,34.9 47,35.35 47,43.45 46.66,43.79 39.55,43.79 v1(38.6,42.84)
  GND w0.254: 45.52,32.87 46.02,32.36 47.19,32.36 47.45,32.61 47.45,32.87 ; 47.45,34 47.52,33.92 47.52,33.48 47.45,33.4
  BOTTOM w0.152: 44.91,32.87 v1(44.21,33.57)
  BOTTOM w0.254: 44.91,32.87 44.91,32.69 51.21,26.39 51.21,10.51 51.89,9.82 51.89,8.86
K9: length 46
  TOP w0.152: UT2.K9 v1(38.6,44.74)
  GND w0.152: 35.22,54.71 35.22,47.02 35.14,46.94 35.14,46.54 35.98,45.69 37.64,45.69 v1(38.6,44.74)
  GND w0.254: v1(41.73,62.2) 41.1,62.84 37.29,62.84 35.22,60.77 35.22,54.71
  BOTTOM w0.254: v1(41.73,62.2) 43.64,64.11 48.37,64.11 53.74,69.48 56.63,69.48 UT1.20
K10: length 43.3
  TOP w0.152: UT2.K10 v1(38.6,45.74)
  GND w0.152: 36.02,54.71 36.02,48.11 36.19,47.94 36.19,46.79 36.73,46.25 37.52,46.25 38.03,45.74 v1(38.6,45.74)
  GND w0.254: v1(41.04,61.57) 40.4,62.2 37.92,62.2 36.02,60.3 36.02,54.71
  BOTTOM w0.254: v1(41.04,61.57) 41.04,62.38 43.4,64.74 48.43,64.74 53.8,70.11 53.8,71.73 UT1.21
K11: length 35.8
  TOP w0.152: UT2.K11 v1(38.6,46.74)
  TOP w0.254: UT1.22 53.16,68.55 49.99,68.55 v1(48.72,67.28)
  BOTTOM w0.152: 38.57,54.71 38.57,50.53 38.08,50.04 38.08,47.25 v1(38.6,46.74)
  BOTTOM w0.254: v1(48.72,67.28) 47.45,66.01 43.52,66.01 38.57,61.07 38.57,54.71
K12: length 34.4
  TOP w0.152: UT2.K12 v1(38.6,47.74)
  BOTTOM w0.152: v1(38.6,47.74) 39.12,48.25 39.12,54.71
  BOTTOM w0.254: 39.12,54.71 39.12,61.03 43.46,65.38 48.08,65.38 51.26,68.56 51.26,71.73 UT1.23
K15: length 30.2
  TOP w0.152: UT2.K15 38.61,50.74 38.61,51.06 38.63,51.09 38.63,51.49 38.61,51.52 38.61,54.71
  TOP w0.254: UT1.24 51.26,69.19 49.29,69.19 45.08,64.97 40.06,64.97 38.61,63.52 38.61,54.71
K16: length 29.9
  TOP w0.152: UT2.K16 38.15,54.71
  TOP w0.254: UT1.25 48.72,71.73 48.72,70.05 44.68,66.01 39.07,66.01 38.15,65.1 38.15,54.71
L1: length 38.1
  TOP w0.152: UT2.L1 39.15,36.01 41.74,33.41 41.74,32.87
  TOP w0.254: 54.43,6.32 53.16,7.59 53.16,9.5 50.57,12.09 47.5,12.09 41.74,17.84 41.74,32.87
L2: length 37.4
  TOP w0.152: UT2.L2 39.63,36.81 39.63,36.16 39.67,36.12 39.67,36.09 42.15,33.61 42.15,32.87
  TOP w0.254: 54.43,8.86 54.43,10.19 52.13,12.5 47.67,12.5 42.15,18.01 42.15,32.87
L3: length 42.1
  TOP w0.152: UT2.L3 v1(39.6,37.84)
  BOTTOM w0.152: 45.47,32.87 45.47,33.7 45.12,34.05 42.79,34.05 39.81,37.02 39.81,37.08 39.6,37.29 v1(39.6,37.84)
  BOTTOM w0.254: 45.47,32.87 45.47,32.71 51.61,26.56 51.61,11.68 53.16,10.13 55.45,10.13 55.7,9.88 55.7,7.59 56.97,6.32
L4: length 40.6
  TOP w0.152: UT2.L4 v1(39.6,38.84)
  BOTTOM w0.152: 45.9,32.87 45.84,32.93 45.84,33.76 45.25,34.36 42.91,34.36 40.12,37.15 40.12,38.32 v1(39.6,38.84)
  BOTTOM w0.254: 45.9,32.87 52.02,26.75 52.02,12.55 53.75,10.82 56.11,10.82 56.97,9.96 56.97,8.86
L6: length 46.6
  TOP w0.152: UT2.L6 v1(39.6,40.84)
  BOTTOM w0.152: v1(39.6,40.84) 40.08,40.36 40.08,39.09 41.1,38.07 41.1,36.66 42.86,34.9 45.13,34.9 46.2,33.83 46.2,33.14 46.47,32.87
  BOTTOM w0.254: 59.51,6.32 58.24,7.59 58.24,10.77 57.79,11.23 54.61,11.23 52.43,13.41 52.43,26.92 46.47,32.87
L7: length 48.9
  TOP w0.152: UT2.L7 v1(39.6,41.84)
  GND w0.152: v1(39.6,41.84) 40.12,42.36 45.7,42.36 46.31,41.75 46.31,34.65 v1(46.64,34.33)
  BOTTOM w0.152: 47.05,32.87 46.51,33.41 46.51,34.03 46.64,34.16 v1(46.64,34.33)
  BOTTOM w0.254: 47.05,32.87 52.83,27.09 52.83,13.58 54.78,11.63 59.26,11.63 59.51,11.38 59.51,8.86
L8: length 54.2
  TOP w0.152: UT2.L8 v1(39.6,42.84)
  GND w0.152: v1(46.99,33.7) 46.99,33.83 47.09,33.93 47.09,34.14 47.14,34.2 47.14,34.57 46.69,35.02 46.69,42.64 45.85,43.48 40.24,43.48 v1(39.6,42.84)
  BOTTOM w0.152: 47.45,33.24 v1(46.99,33.7)
  BOTTOM w0.254: 62.05,6.32 60.78,7.59 60.78,11.4 60.15,12.04 54.95,12.04 53.24,13.75 53.24,27.45 47.45,33.24
L9: length 49.5
  TOP w0.152: UT2.L9 v1(39.6,44.74)
  GND w0.152: v1(39.6,44.74) 40.08,44.25 40.8,44.25 40.97,44.42 41.23,44.42 41.4,44.25 41.8,44.25 41.97,44.42 42.19,44.42 42.42,44.19 46.56,44.19 46.81,44.45 46.81,54.71
  GND w0.254: v1(47.45,60.93) 46.81,60.3 46.81,54.71
  BOTTOM w0.254: v1(47.45,60.93) 48.72,60.93 54.61,66.83 64.14,66.83 UT1.12
L10: length 47.5
  TOP w0.152: UT2.L10 v1(39.6,45.74)
  GND w0.152: 46.18,54.71 46.18,47.04 44.41,45.28 41.1,45.28 41.04,45.22 40.12,45.22 v1(39.6,45.74)
  GND w0.254: v1(46.81,62.11) 46.81,61.6 46.18,60.96 46.18,54.71
  BOTTOM w0.254: v1(46.81,62.11) 48.68,62.11 54.21,67.64 61.77,67.64 63.96,69.82 63.96,71.73 UT1.13
